# Altium PCB Copy of Main_Board.PcbDoc (part 1 of 4)
Units mil, origin at the board's own origin, x right, y up, seen from the top; angles counter-clockwise.
Board outline 5818.45 x 4760.12 mil, 4 copper layers (Top Layer, POWER, GROUND, Bottom Layer), stack 30.634 mil thick; 298 components, 323 nets, 1386 pads, 599 vias.
Unrouted connection lines stored in the file: 1.
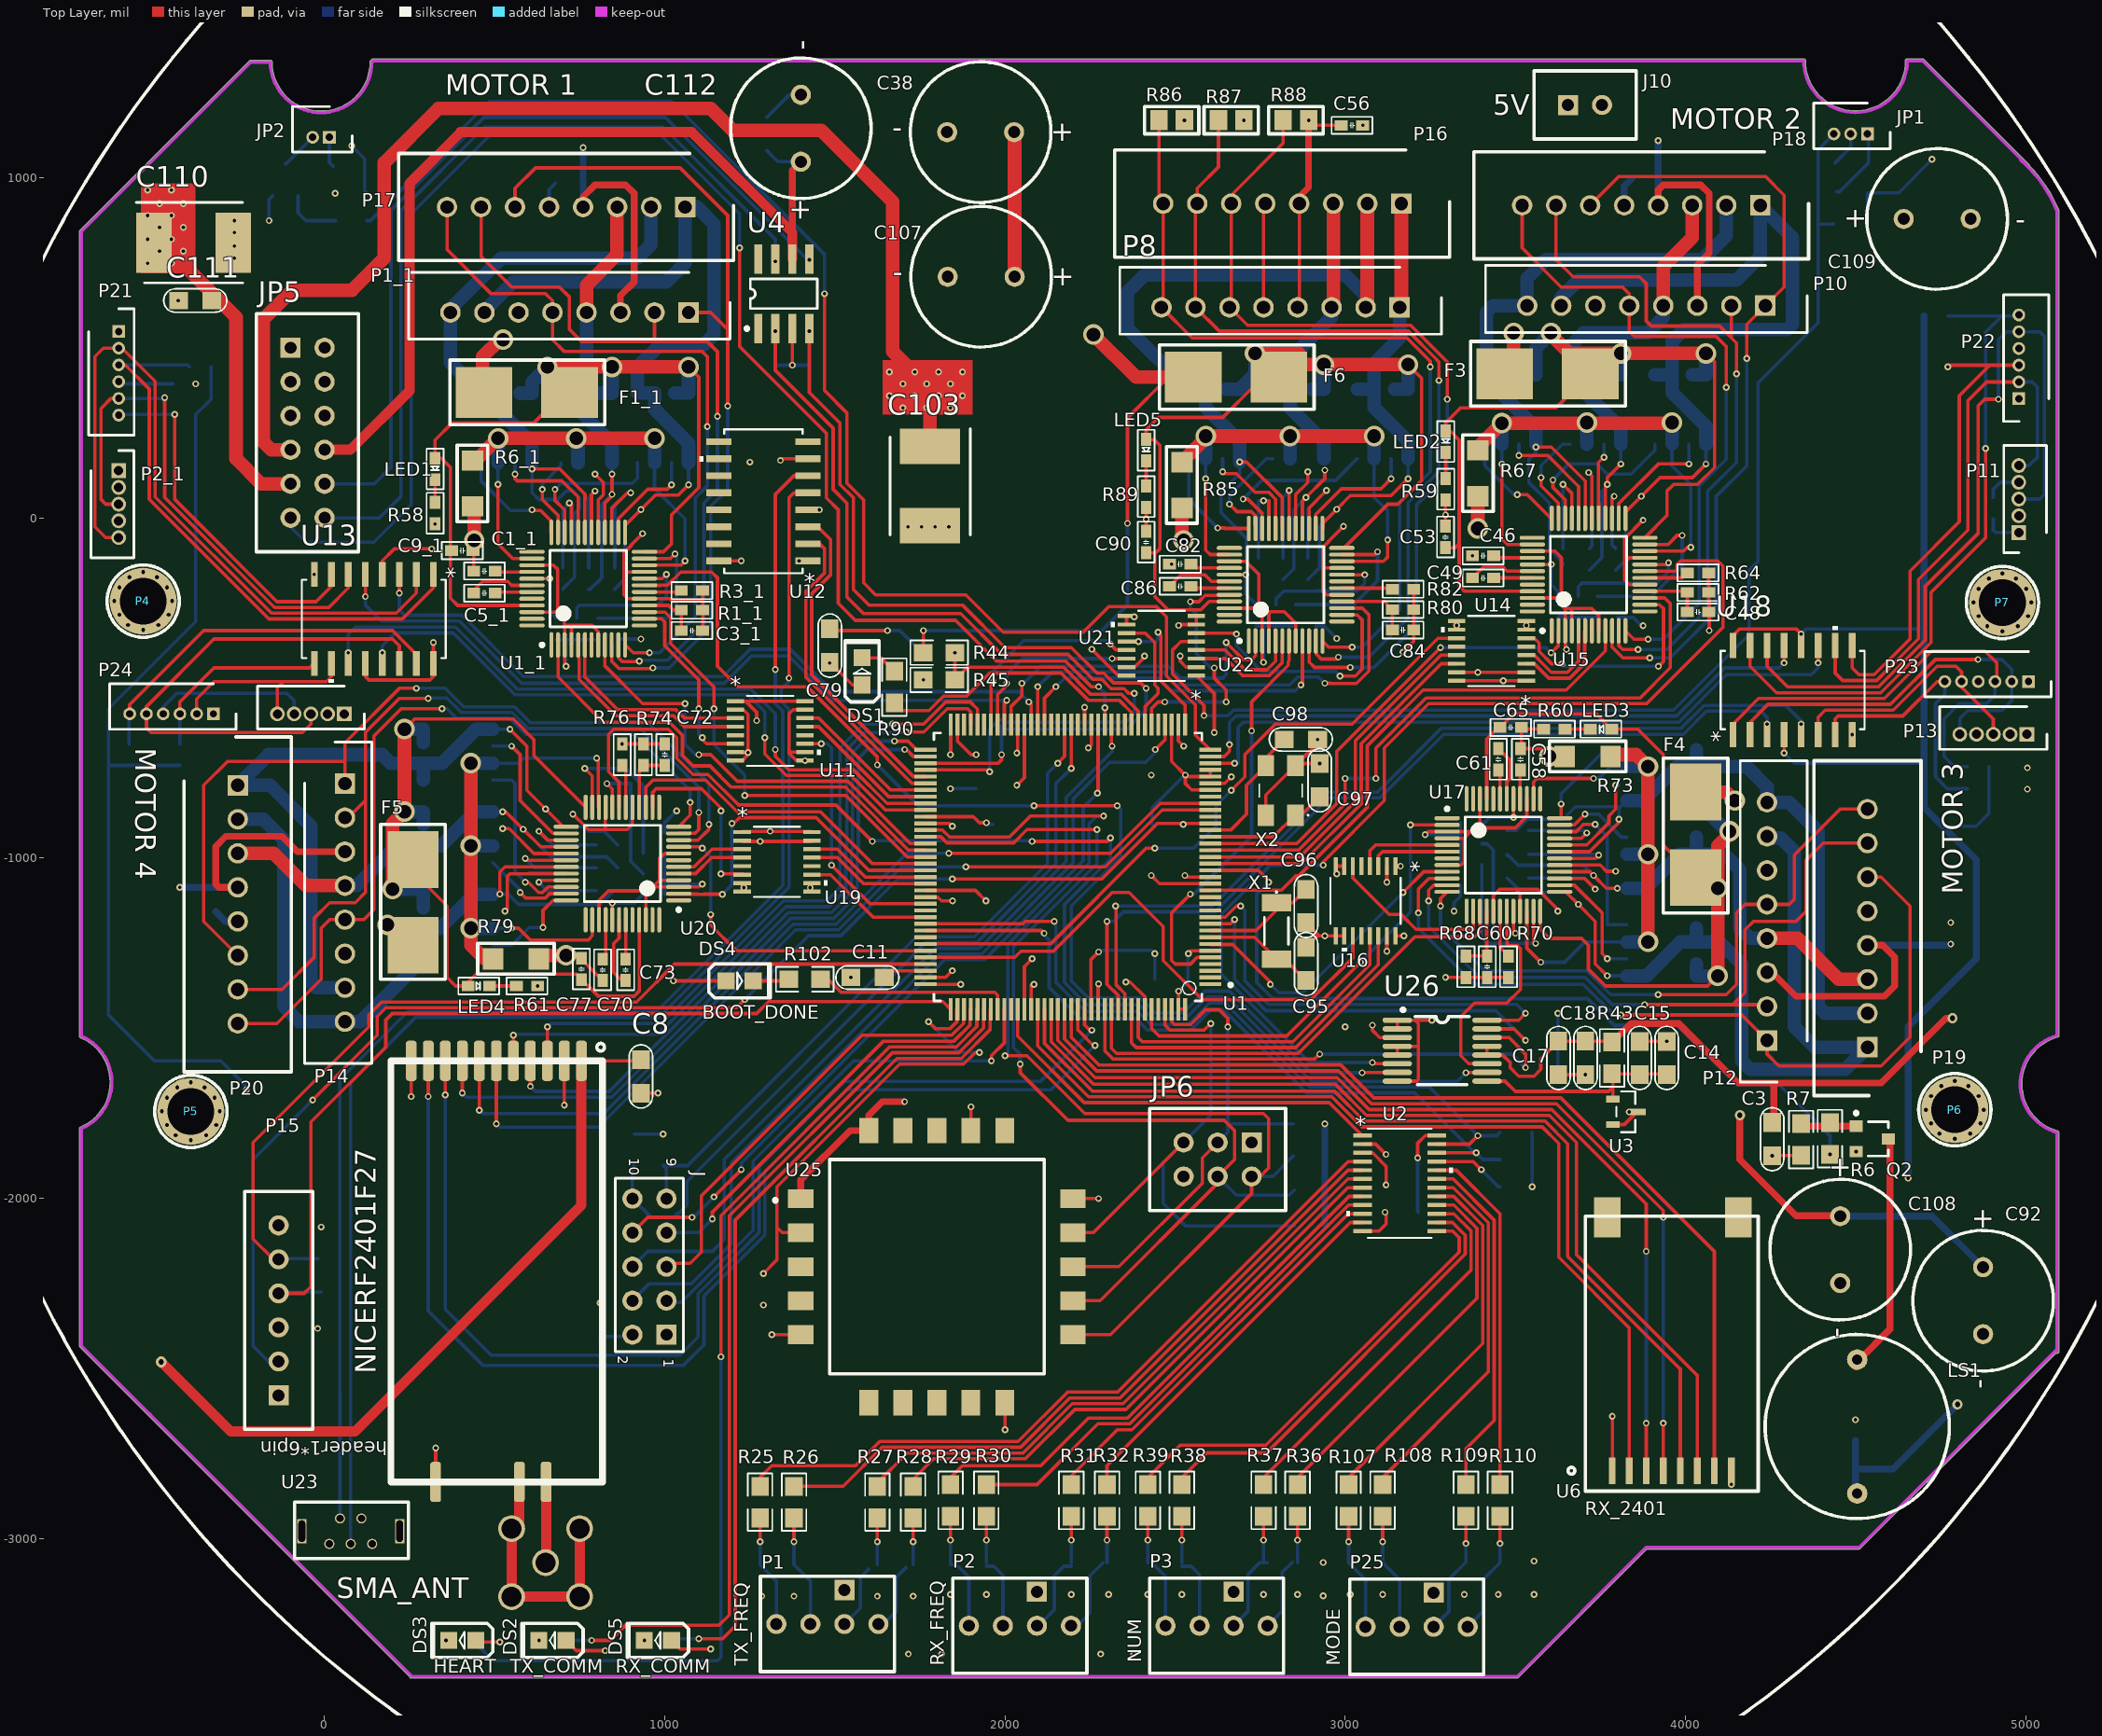
[diagram p0: Top Layer view]
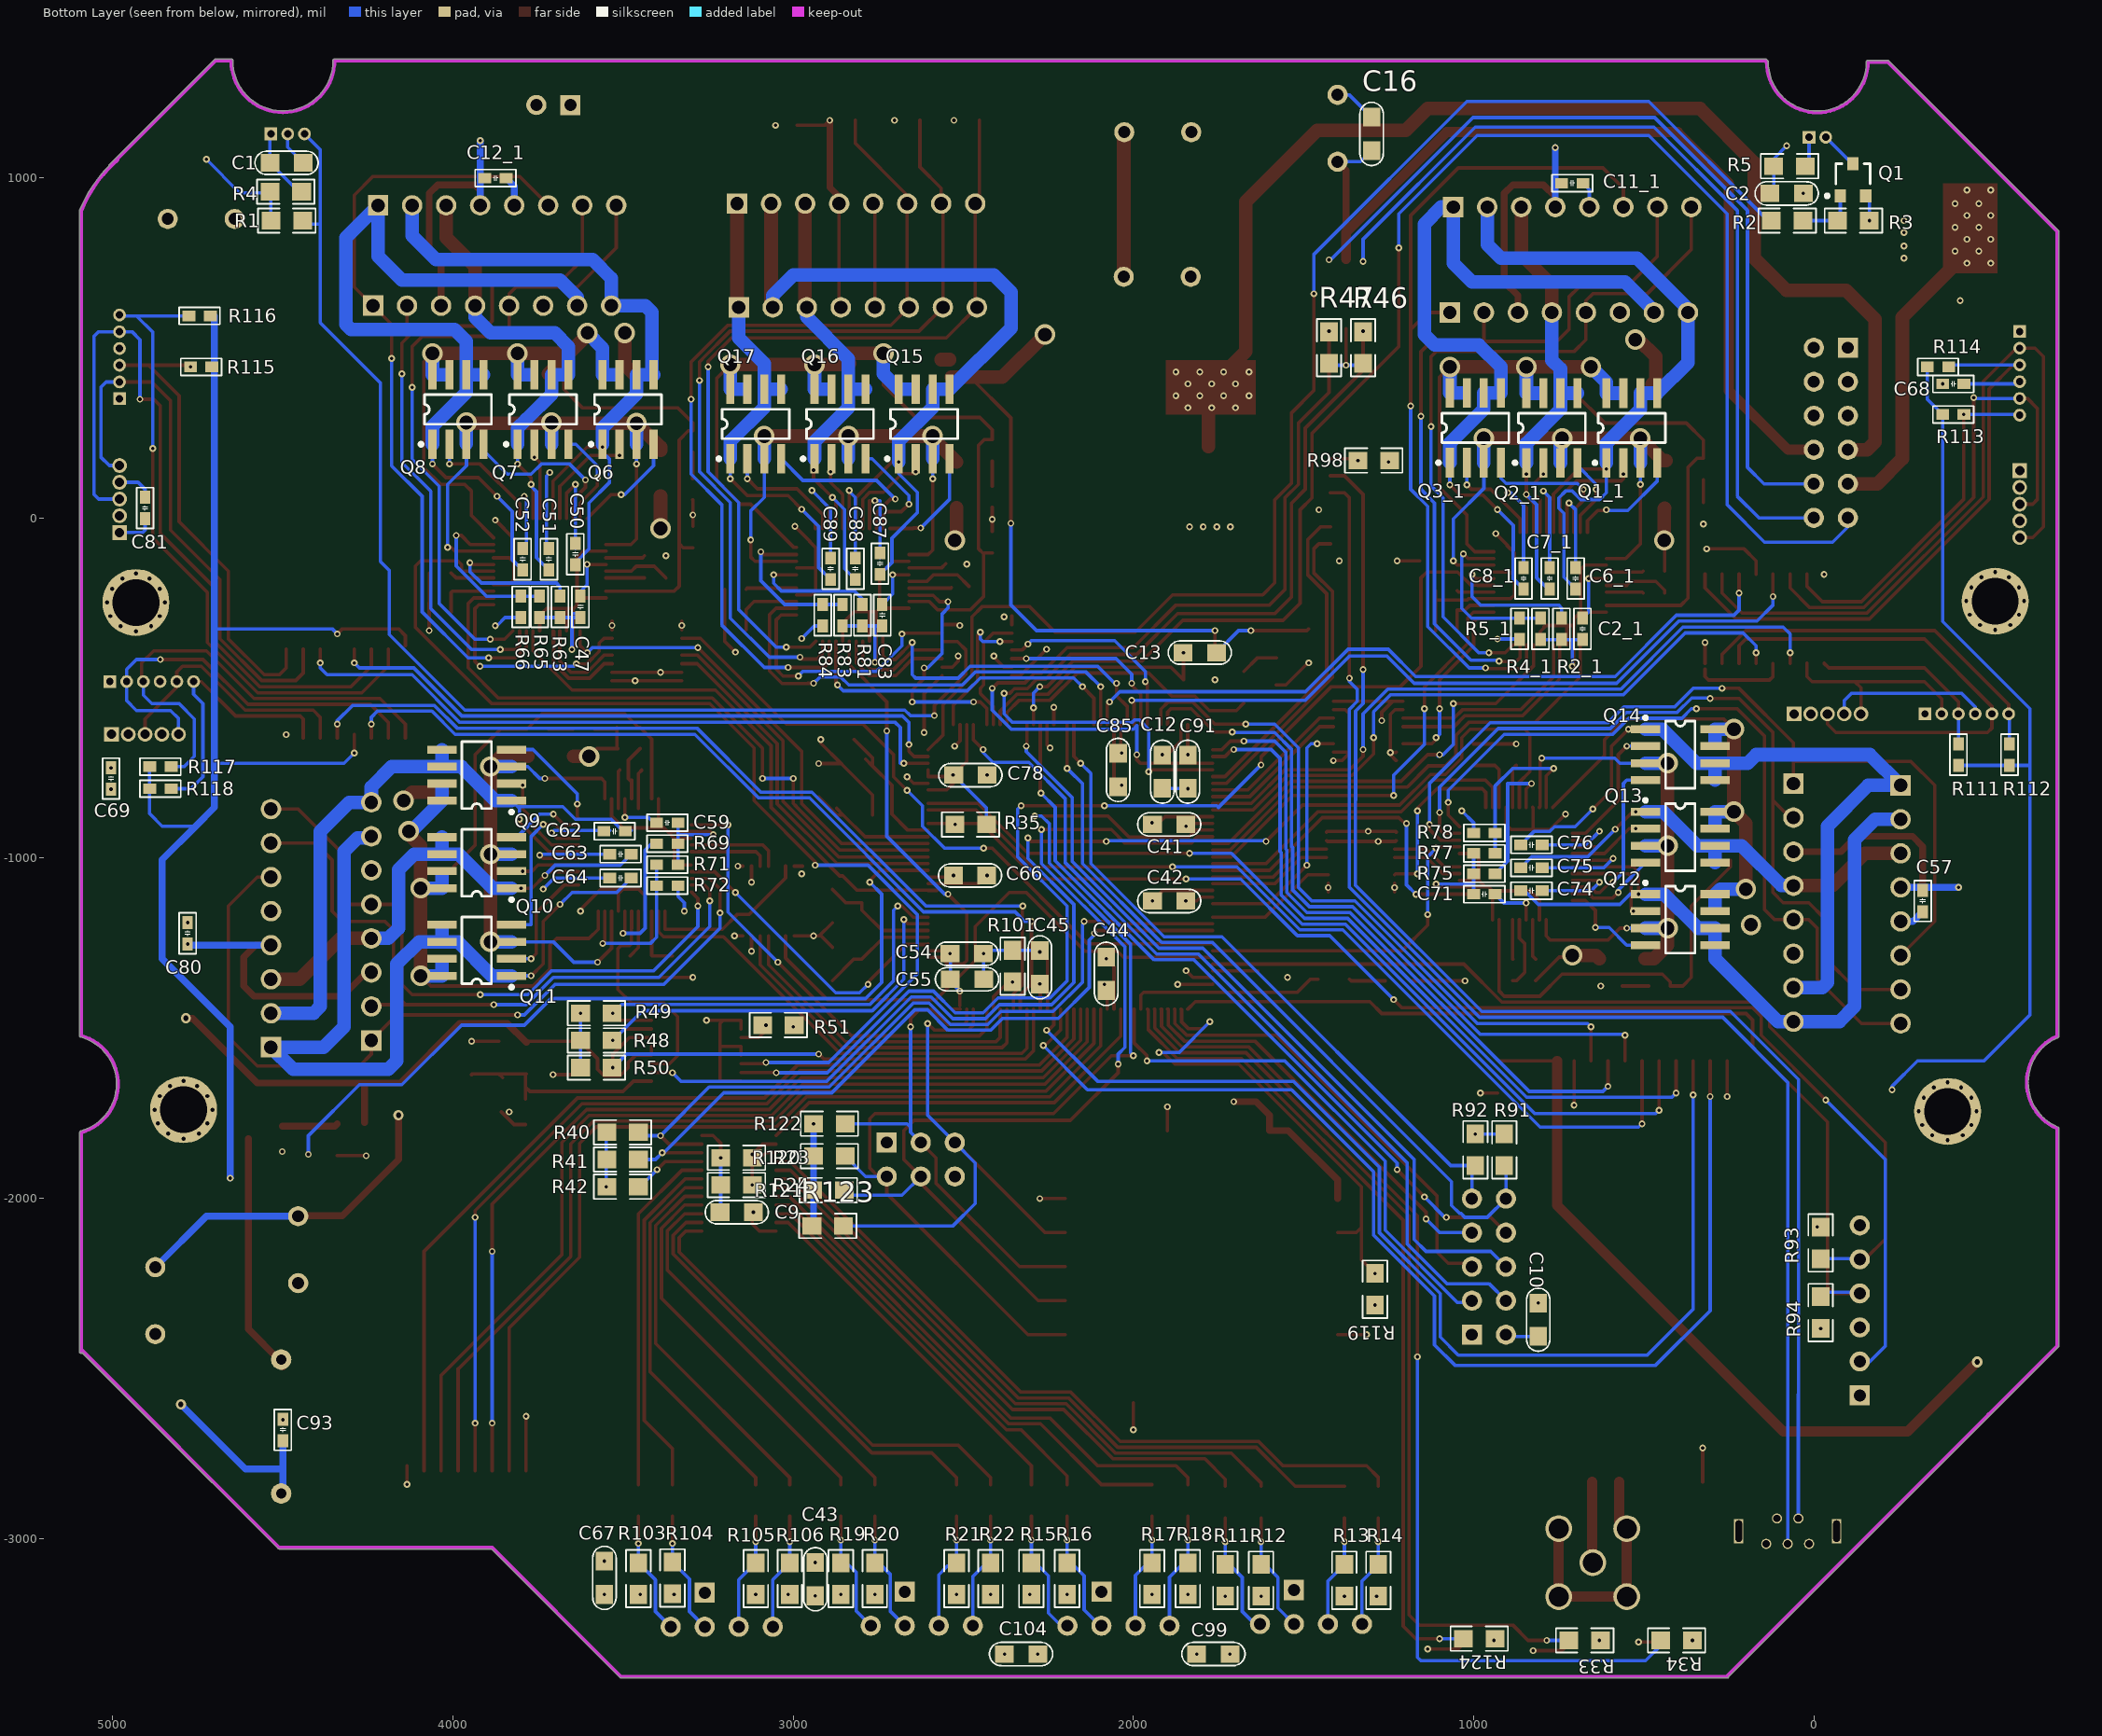
[diagram p1: Bottom Layer view, seen from below]
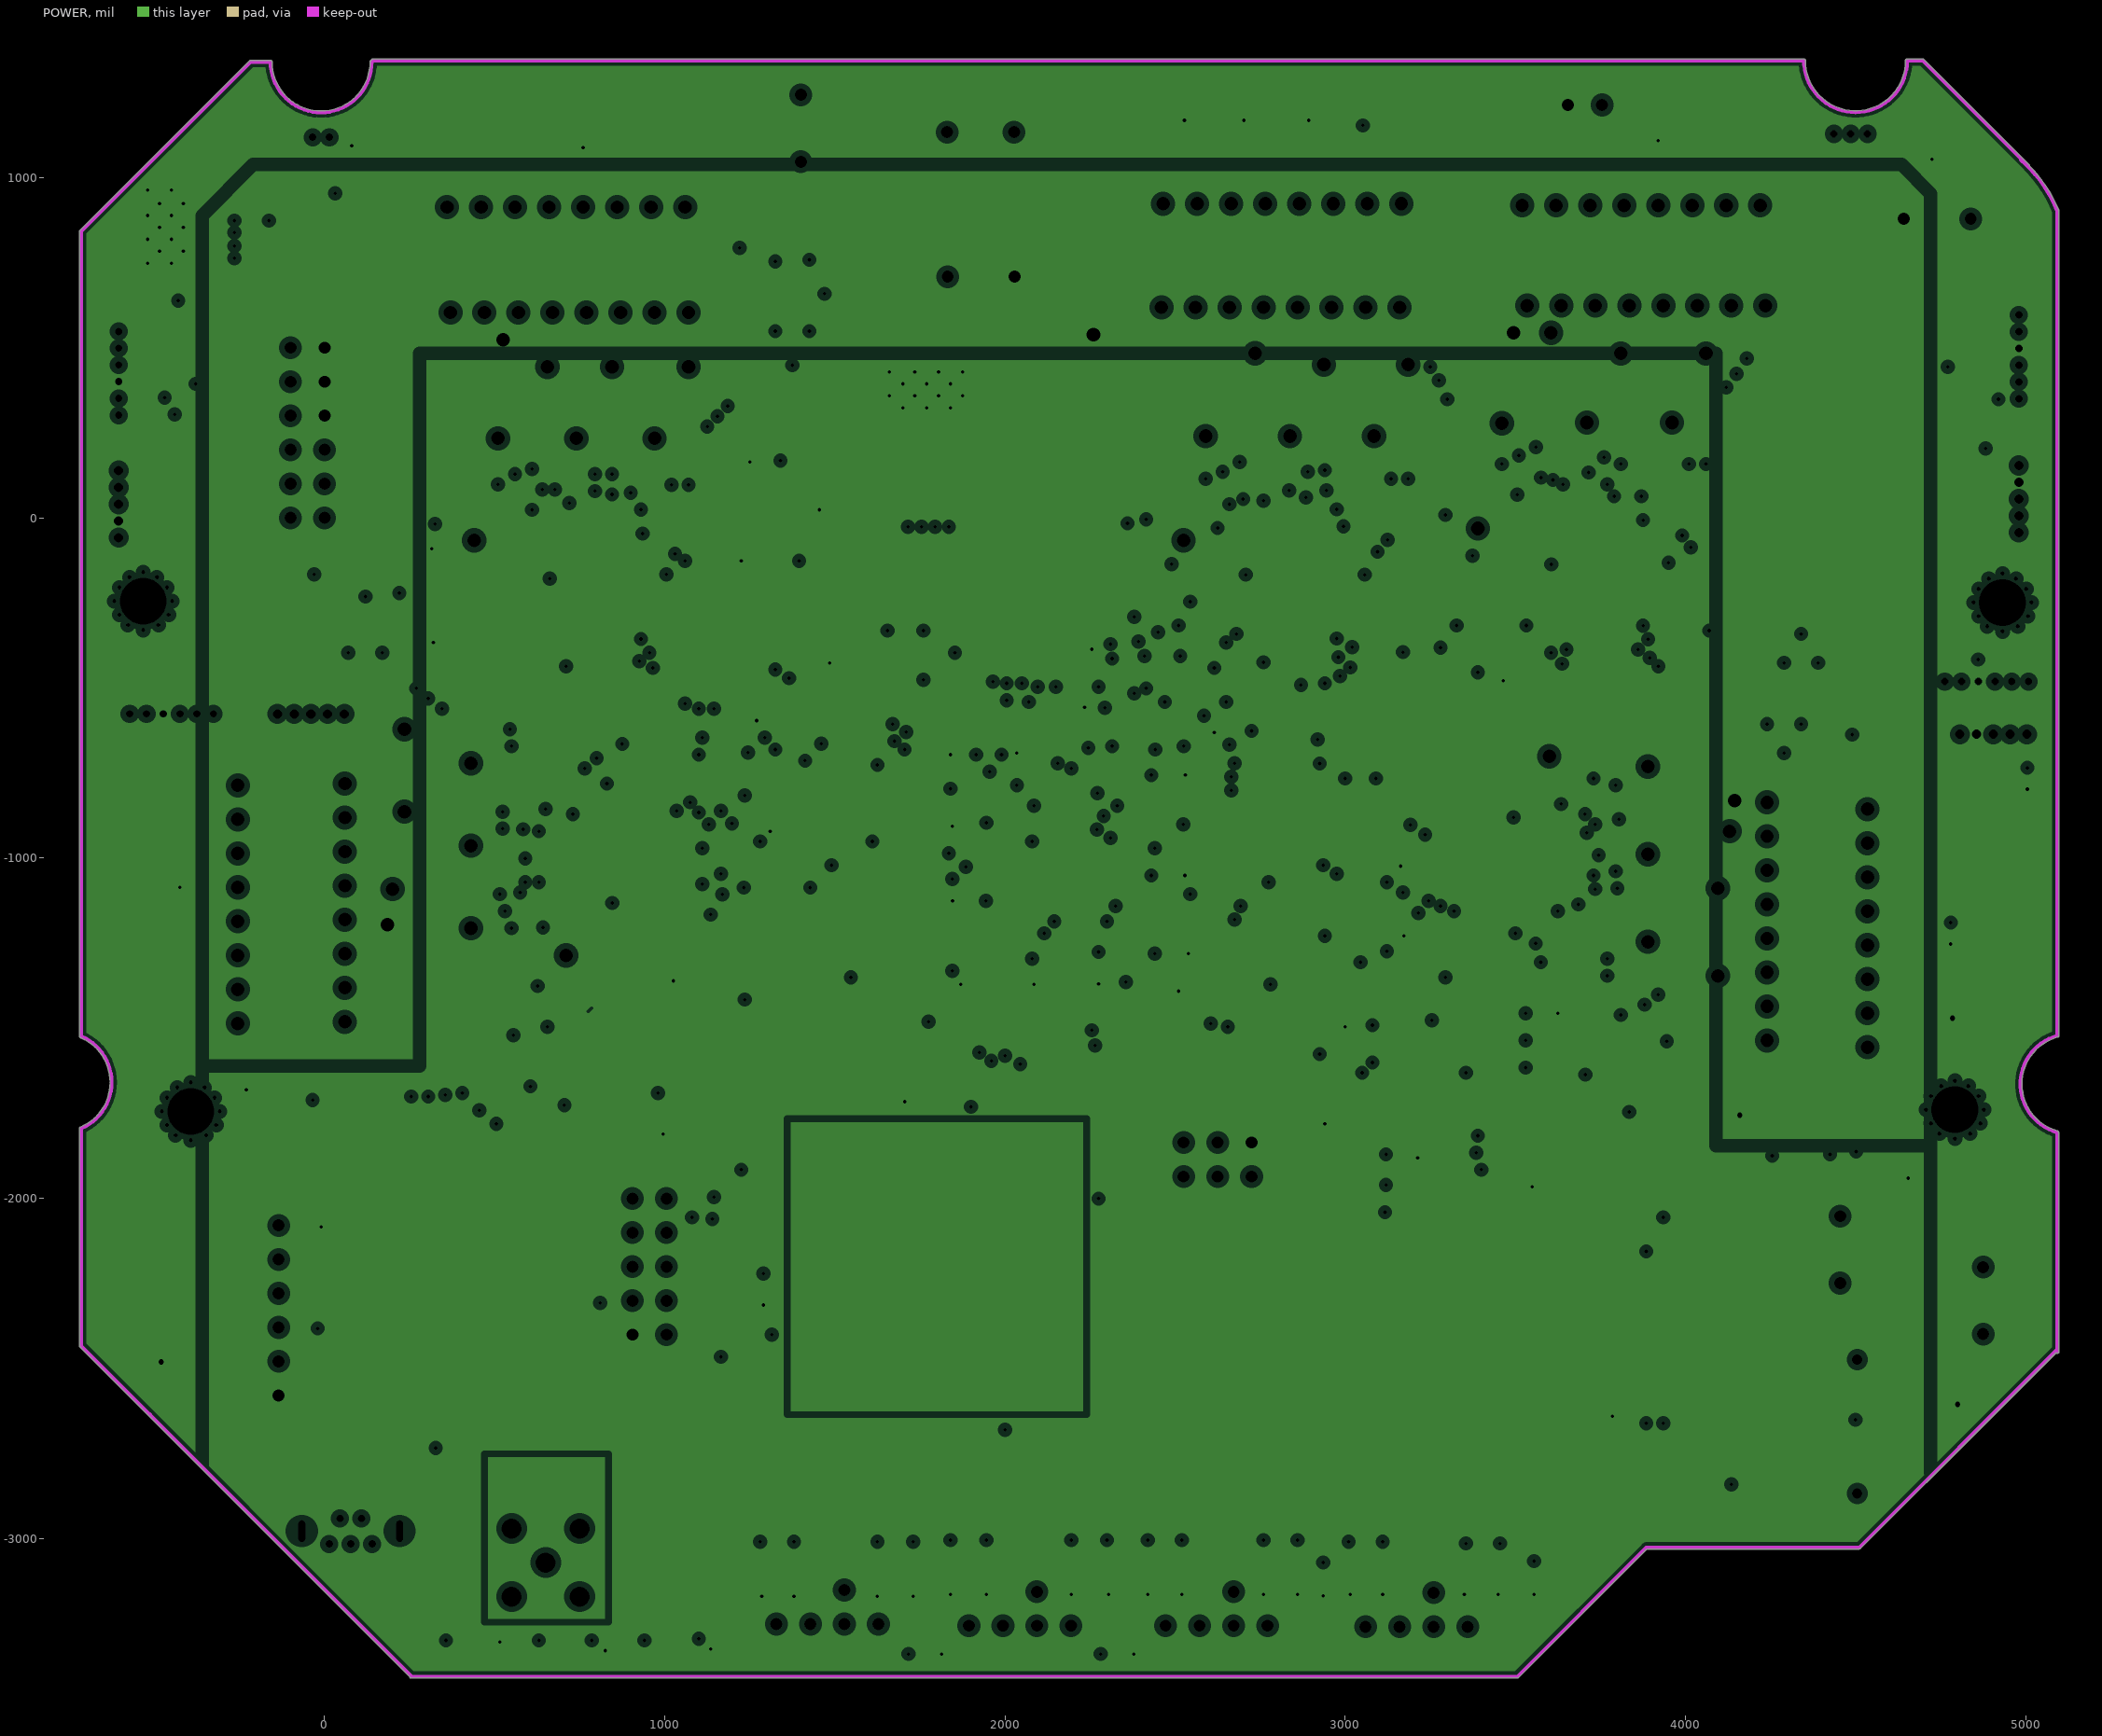
[diagram p2: POWER, clearances drawn from the general rule]
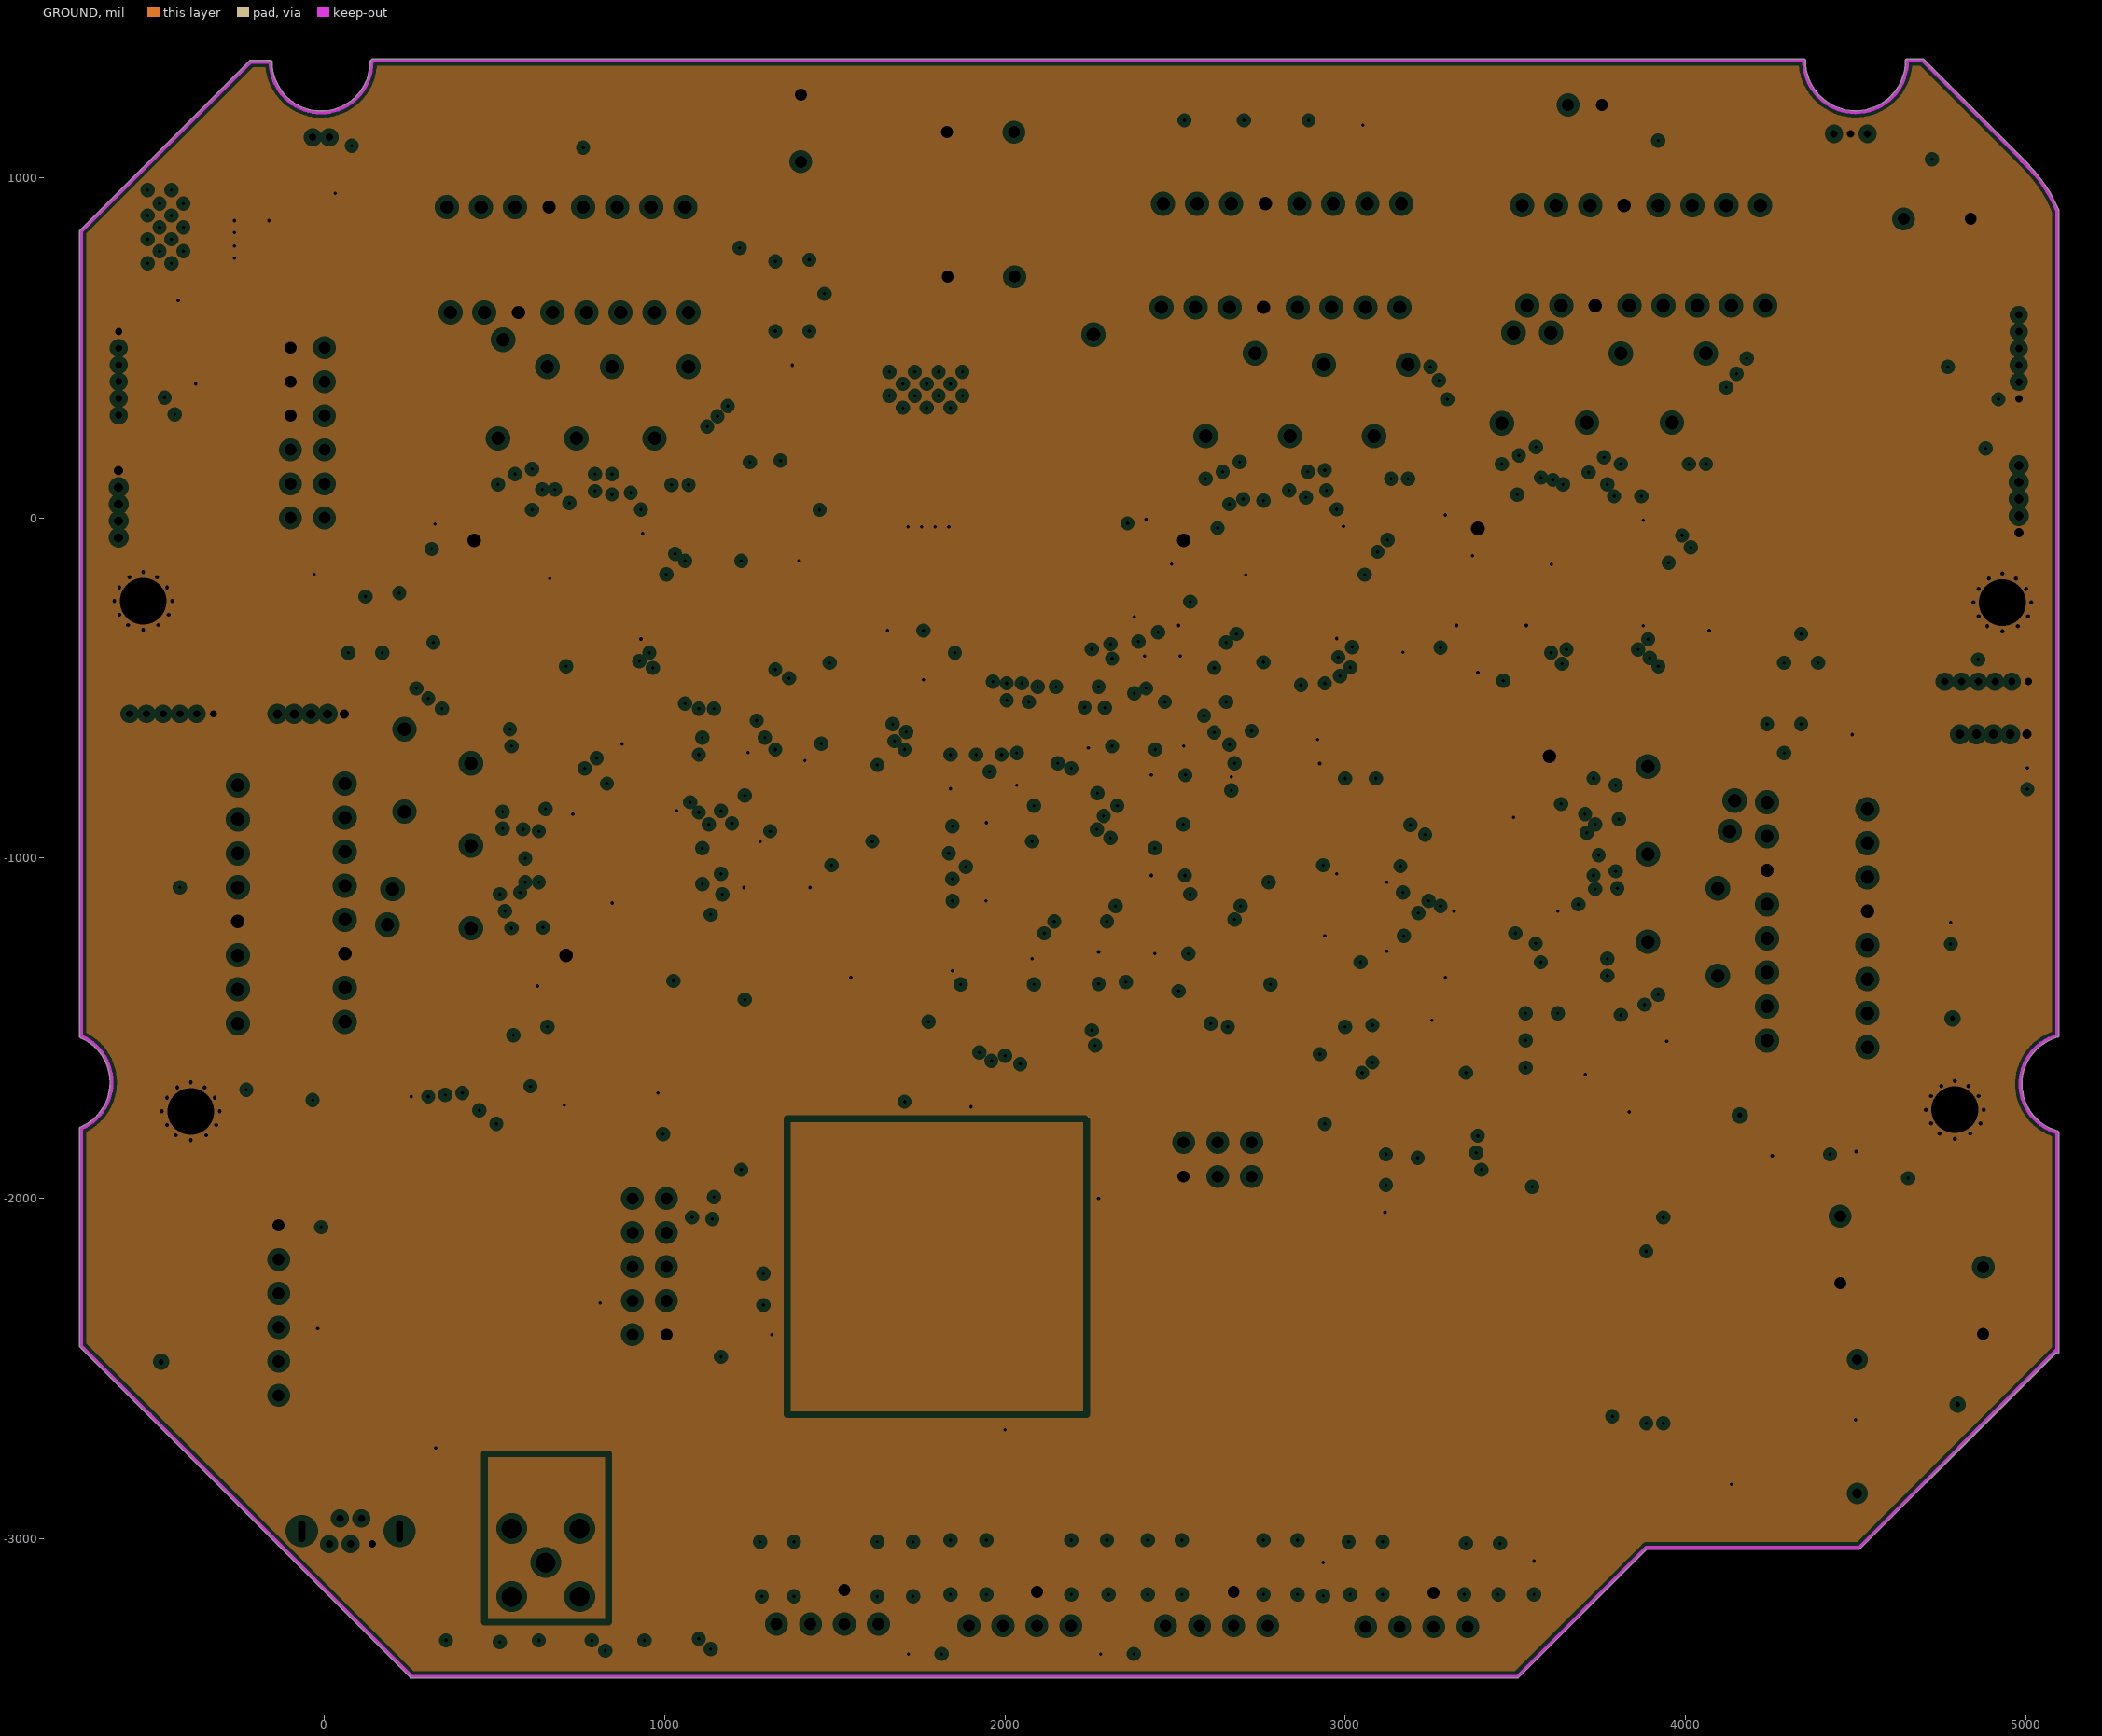
[diagram p3: GROUND, clearances drawn from the general rule]

## Layer stack, top to bottom
Top Solder: solder mask 0.4, Solder Resist, Dk 3.5
Top Layer: signal copper 1.4
Dielectric 1: core 10, FR-4, Dk 4.2
POWER: plane copper 1.417, net (Multiple Nets)
Dielectric 3: prepreg 5, Dk 4.2
GROUND: plane copper 1.417, net GND
Dielectric 2: core 10, Dk 4.2
Bottom Layer: signal copper 1.4
Bottom Solder: solder mask 0.4, Solder Resist, Dk 3.5

## Board outline
-720.02,-2433.98 -720.02,-1797.86 cw(c-715.45,-1795.8) -717.41,-1791.18 ccw(c-773.28,-1659.57) -630.29,-1659.57 ccw(c-773.28,-1659.57) -714.99,-1529 cw(c-715.01,-1523.98) -719.37,-1526.46 cw(c-715.45,-1523.33) -720.02,-1521.27 -720.02,841.5 cw(c-715.01,841.5) -718.54,845.06 -718.55,845.05 -220.16,1343.44 -220.18,1343.43 cw(c-216.61,1339.9) -220.14,1343.47 cw(c-216.57,1339.94) -216.57,1344.96 -159.07,1344.96 cw(c-159.07,1339.94) -154.06,1339.94 cw(c-159.07,1339.94) -154.06,1339.92 ccw(c-10.01,1340.07) 134.04,1340.07 ccw(c-10.01,1340.07) 134.04,1340.16 cw(c139.06,1340.2) 135.51,1343.75 139.11,1347.35 139.09,1347.33 cw(c142.65,1343.8) 142.65,1348.81 4347.92,1348.81 cw(c4347.92,1343.8) 4352.94,1343.8 cw(c4347.92,1343.8) 4352.94,1343.79 ccw(c4499.99,1343.62) 4647.05,1343.62 ccw(c4499.99,1343.62) 4647.05,1344.06 cw(c4652.06,1344.07) 4648.53,1347.63 cw(c4652.09,1344.1) 4652.09,1349.12 4696.9,1349.12 cw(c4696.9,1344.1) 4700.47,1347.63 4700.45,1347.65 5010.04,1038.06 cw(c5006.49,1034.52) 5011.51,1034.52 cw(c5006.49,1034.52) 5011.51,1034.42 cw(c4727.24,755.06) 5095.98,906.33 cw(c5092.97,902.31) 5097.99,902.31 5097.99,-1522.02 cw(c5092.97,-1522.02) 5093.13,-1527.03 ccw(c5132.24,-1664.57) 5093.47,-1802.2 cw(c5092.12,-1807.02) 5097.13,-1807.02 cw(c5092.12,-1807.02) 5097.13,-1807.02 5097.98,-2443.67 cw(c5092.97,-2443.98) 5097.99,-2443.98 cw(c5092.97,-2443.98) 5097.98,-2444.28 5097.99,-2451 cw(c5092.97,-2451) 5097.99,-2451 cw(c5092.97,-2451) 5089.46,-2454.59 4898.79,-2645.25 cw(c4894.99,-2641.98) 4898.52,-2645.55 4898.54,-2645.53 4514.14,-3029.93 4514.16,-3029.91 cw(c4510.59,-3026.38) 4510.59,-3031.4 3887.07,-3031.4 3508.94,-3409.53 3508.95,-3409.51 cw(c3505.39,-3405.98) 3505.39,-3411 2551.1,-3411 254.99,-3411 cw(c254.99,-3405.98) 249.98,-3406.06 -718.55,-2437.53 -718.54,-2437.55 cw(c-715.01,-2433.98)

## Design rules (kind name [scope] priority, off if disabled: settings)
Clearance [All] p1: gap=7 ignorepadtopadclearanceinfootprint=TRUE
ComponentClearance [All] p1: gap=0 collisioncheckmode=3 verticalgap=0 showdistances=FALSE
HoleSize [All] p1: absolutevalues=TRUE maxlimit=1000 minlimit=7 maxpercent=80.000 minpercent=20.000
HoleToHoleClearance [All] p1: gap=5.5 allowstackedmicrovias=TRUE
MinimumSolderMaskSliver [All] p1: minsoldermaskwidth=0
PlaneClearance [All] p1: clearance=16
PlaneConnect [All] p1: planeconnectstyle=Direct reliefexpansion=20 reliefentries=4 reliefconductorwidth=10 reliefairgap=10
PolygonConnect [All] p1: connectstyle=Direct reliefconductorwidth=10 reliefentries=4 polygonreliefangle="90 Angle" airgapwidth=10
RoomDefinition Motor_d [InComponentClass('Motor_d')] p1 off: confinementstyle=ConfineIn formatcopy=TRUE lockcomponents=FALSE outline -16600.01,-13221.38 -14600.01,-13221.38 -14600.01,-12221.38 -16600.01,-12221.38
RoomDefinition Motor_4 [InComponentClass('Motor_4')] p2 off: confinementstyle=ConfineIn formatcopy=TRUE lockcomponents=FALSE outline -16600.01,-13221.38 -14600.01,-13221.38 -14600.01,-12221.38 -16600.01,-12221.38
RoomDefinition Motor_3 [InComponentClass('Motor_3')] p3 off: confinementstyle=ConfineIn formatcopy=TRUE lockcomponents=FALSE outline -16600.01,-13221.38 -14600.01,-13221.38 -14600.01,-12221.38 -16600.01,-12221.38
RoomDefinition Motor_2 [InComponentClass('Motor_2')] p4 off: confinementstyle=ConfineIn formatcopy=TRUE lockcomponents=FALSE outline -16600.01,-13221.38 -14600.01,-13221.38 -14600.01,-12221.38 -16600.01,-12221.38
RoomDefinition Motor_1 [InComponentClass('Motor_1')] p5 off: confinementstyle=ConfineIn formatcopy=TRUE lockcomponents=FALSE outline -16600.01,-13221.38 -14600.01,-13221.38 -14600.01,-12221.38 -16600.01,-12221.38
RoomDefinition Main_Board [InComponentClass('Main_Board')] p6 off: confinementstyle=ConfineIn formatcopy=TRUE lockcomponents=FALSE outline -16600.01,-13221.38 -14600.01,-13221.38 -14600.01,-12221.38 -16600.01,-12221.38
RoutingVias [All] p1: holewidth=10 width=20 viastyle="Through Hole" minholewidth=7 minwidth=14 maxholewidth=150 maxwidth=200
SilkToSilkClearance [All] p1: silktosilkclearance=0
SilkToSolderMaskClearance [IsPad] p1: minsilkscreentomaskgap=0 clearancetoexposedcopper=TRUE
SolderMaskExpansion [All] p1: expansion=4
UnRoutedNet [All] p1: checkbadconnections=TRUE
Width [All] p1: maxlimit=100 minlimit=10 preferedwidth=40
21 further rules are at their usual default settings.

## Classes and differential pairs
component class Motor_d: C82 C83 C84 C86 C87 C88 C89 C90 C92 C93 F6 LED5 P8 P16 Q15 Q16 Q17 R80 R81 R82 R83 R84 R85 R86 R87 R88 R89 U21 U22
component class Motor_4: C70 C71 C72 C73 C74 C75 C76 C77 C80 C81 F5 LED4 P14 P15 P20 P24 Q12 Q13 Q14 R61 R74 R75 R76 R77 R78 R79 U19 U20
component class Motor_3: C58 C59 C60 C61 C62 C63 C64 C65 C68 C69 F4 LED3 P12 P13 P19 P23 Q9 Q10 Q11 R60 R68 R69 R70 R71 R72 R73 R115 R116 R117 R118 U16 U17 U18
component class Motor_2: C46 C47 C48 C49 C50 C51 C52 C53 C56 C57 C108 C109 F3 LED2 P10 P11 P18 P22 Q6 Q7 Q8 R59 R62 R63 R64 R65 R66 R67 U14 U15
component class Motor_1: C1_1 C2_1 C3_1 C5_1 C6_1 C7_1 C8_1 C9_1 C10_1 C11_1 C12_1 C38 C107 F1_1 LED1 P1_1 P2_1 P17 P21 Q1_1 Q2_1 Q3_1 R1_1 R2_1 R3_1 R4_1 R5_1 R6_1 R58 R111 R112 R113 R114 U1_1 U11 U13
component class Main_Board: C1 C2 C3 C8 C9 C10 C11 C12 C13 C14 C15 C16 C17 C18 C25 C41 C42 C43 C44 C45 C54 C55 C66 C67 C78 C79 C85 C91 C95 C96 C97 C98 C99 C103 C104 C110 C111 C112 DS1 DS2 DS3 DS4 DS5 header1*6pin J J10 JP1 JP2 JP5 JP6 LS1 NICERF2401F27 P1 P2 P3 P4 P5 P6 P7 P25 Q1 Q2 R1 R2 R3 R4 R5 R6 R7 R11 R12 R13 R14 R15 R16 R17 R18 R19 R20 R21 R22 R23 R24 R25 R26 R27 R28 R29 R30 R31 R32 R33 R34 R35 R36 R37 R38 R39 R40 R41 R42 R43 R44 R45 R46 R47 R48 R49 R50 R51 R90 R91 R92 R93 R94 R98 R101 R102 R103 R104 R105 R106 R107 R108 R109 R110 R119 R120 R121 R122 R123 R124 SMA_ANT U1 U2 U3 U4 U6 U12 U23 U25 U26 X1 X2

## Components (designator, comment, footprint, x,y, rotation, side; value= is the part's Value field where it differs from the comment)
C1 "0.1uf" 0805C 4533.99,1043.62 r180 bottom value=0.1uF
C1_1 "1uF" 0603C 469.99,-156.38 r0 top
C2 "0.1uf" 0805C 34.99,953.62 r0 bottom value=0.1uF
C2_1 "1uF" 0603C 679.99,-326.38 r270 bottom
C3 "0.1uF" 0805C 4254.99,-1871.38 r90 top
C3_1 "1nF" 0603C 1079.99,-331.38 r180 top
C5_1 "470nF" 0603C 469.99,-221.38 r180 top
C6_1 "33nF" 0603C 699.99,-178.27 r90 bottom
C7_1 "33nF" 0603C 776.57,-178.27 r90 bottom
C8 "0.1uF" 0805C 929.99,-1597.38 r270 top
C8_1 "33nF" 0603C 853.15,-178.27 r90 bottom
C9 "0.1uF" 0805C 3120.99,-2041.38 r0 bottom
C9_1 "1uF" 0603C 404.99,-96.38 r180 top
C10 "0.1uF" 0805C 809.99,-2312.38 r270 bottom
C11 "1uf" 0805C 1550.99,-1351.38 r0 top value=1uF
C11_1 "0.1uF" 0603C 709.99,983.62 r0 bottom
C12 "1uf" 0805C 1914.99,-791.38 r90 bottom value=1uF
C12_1 "0.1uF" 0603C 3874.99,998.62 r0 bottom
C13 "10uF" 0805C 1759.99,-396.38 r0 bottom
C14 "1uF" 0805C 3944.99,-1543.07 r270 top
C15 "0.1uF" 0805C 3865.49,-1543.07 r270 top
C16 "0.1uF" 0805C 1299.99,1083.62 r90 bottom
C17 "0.1uF" 0805C 3626.79,-1632.7 r90 top
C18 "0.1uF" 0805C 3706.29,-1632.7 r90 top
C38 "470uF" 470uF 1928.42,1133.62 r180 top
C41 "0.1uF" 0805C 1849.99,-901.38 r0 bottom
C42 "0.1uF" 0805C 1849.99,-1126.38 r0 bottom
C43 "0.1uF" 0805C 2934.99,-3165.08 r90 bottom
C44 "0.1uF" 0805C 2079.99,-1385.38 r90 bottom
C45 "0.1uF" 0805C 2274.99,-1366.38 r90 bottom
C46 "1uF" 0603C 3405.46,-111.85 r0 top
C47 "1uF" 0603C 3625.46,-261.85 r270 bottom
C48 "1nF" 0603C 4036.96,-276.85 r180 top
C49 "470nF" 0603C 3405.46,-176.85 r180 top
C50 "33nF" 0603C 3640.46,-106.85 r90 bottom
C51 "33nF" 0603C 3717.96,-121.85 r90 bottom
C52 "33nf" 0603C 3795.46,-121.85 r90 bottom value=33nF
C53 "1uF" 0603C 3294.99,-56.38 r270 top
C54 "0.1uF" 0805C 2534.99,-1281.38 r180 bottom
C55 "0.1uF" 0805C 2533.99,-1356.38 r180 bottom
C56 "0.1uF" 0603C 3019.99,1153.62 r180 top
C57 "0.1uF" 0603C -320.01,-1126.38 r90 bottom
C58 "1uF" 0603C 3514.99,-709.88 r270 top
C59 "1uF" 0603C 3369.99,-896.38 r180 bottom
C60 "1nF" 0603C 3417.49,-1319.88 r90 top
C61 "470nF" 0603C 3449.99,-709.88 r90 top
C62 "33nF" 0603C 3524.99,-921.38 r0 bottom
C63 "33nF" 0603C 3507.49,-988.88 r0 bottom
C64 "33nF" 0603C 3507.49,-1058.88 r0 bottom
C65 "1uF" 0603C 3486.49,-616.38 r180 top
C66 "0.1uF" 0805C 2524.99,-1051.38 r180 bottom
C67 "0.1uF" 0805C 3554.99,-3161.08 r90 bottom
C68 "0.1uF" 0603C -410.01,393.62 r180 bottom
C69 "0.1uF" 0603C 5004.99,-766.38 r270 bottom
C70 "1uF" 0603C 817.49,-1328.88 r90 top
C71 "1uF" 0603C 968.49,-1106.38 r0 bottom
C72 "1nF" 0603C 999.99,-696.38 r270 top
C73 "470nF" 0603C 884.99,-1328.88 r270 top
C74 "33nF" 0603C 829.99,-1096.38 r180 bottom
C75 "33nF" 0603C 829.99,-1028.88 r180 bottom
C76 "33nF" 0603C 829.99,-961.38 r180 bottom
C77 "1uF" 0603C 754.99,-1326.38 r270 top
C78 "0.1uF" 0805C 2523.99,-756.38 r180 bottom
C79 "0.1uF" 0805C 1484.99,-420.38 r90 top
C80 "0.1uF" 0603C 4779.99,-1221.38 r270 bottom
C81 "0.1uF" 0603C 4904.99,28.62 r90 bottom
C82 "1uF" 0603C 2514.99,-136.38 r0 top
C83 "1uF" 0603C 2738.33,-286.38 r270 bottom
C84 "1nF" 0603C 3169.99,-329.88 r180 top
C85 "0.1uF" 0805C 2044.99,-696.38 r270 bottom
C86 "470nF" 0603C 2514.99,-201.38 r180 top
C87 "33nF" 0603C 2744.99,-134.88 r90 bottom
C88 "33nF" 0603C 2817.49,-149.88 r90 bottom
C89 "33nF" 0603C 2889.99,-149.88 r90 bottom
C90 "1uF" 0603C 2414.99,-71.38 r270 top
C91 "0.1uF" 0805C 1839.99,-701.38 r270 bottom
C92 "470uF" 470uF 4874.99,-2301.38 r270 top
C93 "0.1uF" 0603C 4499.99,-2681.38 r270 bottom
C95 "2pf" 0805C 2884.99,-1356.38 r90 top value=2pF
C96 "2pf" 0805C 2884.99,-1096.38 r270 top value=2pF
C97 "4.3pf" 0805C 2924.99,-816.38 r90 top value=4.3pF
C98 "4.3pf" 0805C 2824.99,-651.38 r0 top value=4.3pF
C99 "0.1uF" 0805C 1719.99,-3340.08 r0 bottom
C103 "CAP470" CAPPM7360X200N 1779.99,93.62 r270 top
C104 "0.1uF" 0805C 2374.99,-3340.08 r180 bottom
C107 "470uF" 470uF 1929.99,708.62 r180 top
C108 "470uF" 470uF 4454.99,-2151.38 r270 top
C109 "470uF" 470uF 4739.99,878.62 r0 top
C110 "CAP470" CAPPM7360X200N -385.01,808.62 r0 top
C111 "0.1uF" 0805C -335.01,638.62 r180 top
C112 "470uF" 470uF 1399.99,1145.19 r90 top
DS1 "LED2" 0805D 1579.99,-491.38 r90 top
DS2 "LED1" 0805D 709.99,-3300.08 r180 top
DS3 "LED2" 0805D 444.99,-3300.08 r180 top
DS4 "LED2" 0805D 1179.99,-1361.38 r0 top
DS5 "LED1" 0805D 1019.99,-3300.08 r180 top
F1_1 "10A" FUSE_HEADER 468.81,368.62 r0 top
F3 "10A" FUSE_HEADER 3468.81,423.62 r0 top
F4 "10A" FUSE_HEADER 4029.99,-806.38 r270 top
F5 "10A" FUSE_HEADER 259.99,-1256.38 r90 top
F6 "10A" FUSE_HEADER 2553.81,413.62 r0 top
header1*6pin "header1*6pin" 1*6_2.5mm -135,-2580 r90 top locked
J "10" 10 904.99,-2401.38 r90 top
J10 "1*2*2.5mm" 1*2_2.5mm 3654.99,1213.62 r270 top locked
JP1 "Header 3" SHDR3 4534.99,1128.62 r0 top
JP2 "Header 2" SHDR2 14.2,1118.62 r0 top
JP5 "Header 4X2" 2*6_2.5mm -100,500 r270 top locked
JP6 "header6pin" 2*3_2.5mm 2724.99,-1836.38 r180 top
LED1 "led" 0603_diode 324.99,143.62 r270 top
LED2 "led" 0603_diode 3295.46,224.09 r270 top
LED3 "led" 0603_diode 3751.49,-621.38 r180 top
LED4 "led" 0603_diode 453.49,-1376.38 r0 top
LED5 "led" 0603_diode 2414.99,198.62 r270 top
LS1 "Buzzer" Buzzer 4504.99,-2671.38 r90 top
NICERF2401F27 "NICERF2401F27" NICERF2401F27 754.99,-1596.38 r270 top locked
P1 "COAX-M" A6RV-161RS 1527.99,-3151.98 r0 top
P1_1 "Header_8P" "8P - WF25122" 719.99,603.62 r90 top locked
P2 "COAX-M" A6RV-161RS 2093.99,-3156.98 r0 top
P2_1 "Header 5" SHDR5 -605.01,138.62 r270 top locked
P3 "COAX-M" A6RV-161RS 2671.99,-3156.98 r0 top
P4 "安装孔" 安装孔-3.5-5 -533,-245 r0 top locked
P5 "安装孔" 安装孔-3.5-5 -393,-1745 r0 top locked
P6 "安装孔" 安装孔-3.5-5 4792,-1740 r0 top locked
P7 "安装孔" 安装孔-3.5-5 4932,-249 r0 top locked
P8 "Header_8P" "8P - WF25122" 2809.99,618.62 r90 top locked
P10 "Header_8P" "8P - WF25122" 3884.99,623.62 r90 top locked
P11 "Header 5" SHDR5 4979.99,-43.23 r90 top
P12 "Header_8P" "8P - WF25122" 4239.99,-1186.38 r0 top locked
P13 "Header 5" SHDR5 5003.42,-636.38 r180 top
P14 "Header_8P" "8P - WF25122" 59.99,-1131.38 r180 top locked
P15 "Header 5" SHDR5 58.42,-576.38 r180 top
P16 "Header_8P" SHDR8 2814.99,923.62 r90 top locked
P17 "Header_8P" SHDR8 709.99,913.62 r90 top locked
P18 "Header_8P" SHDR8 3869.99,918.62 r90 top locked
P19 "Header_8P" SHDR8 4534.99,-1206.38 r0 top locked
P20 "Header_8P" SHDR8 -255.01,-1136.38 r180 top locked
P21 "Header 5" SHDR6 -605.01,547.83 r270 top locked
P22 "Header 5" SHDR6 4979.99,350.19 r90 top
P23 "Header 5" SHDR6 5008.42,-481.38 r180 top
P24 "Header 5" SHDR6 -326.58,-576.38 r180 top
P25 "COAX-M" A6RV-161RS 3259.99,-3160.08 r0 top
Q1 "9013" SO-G3/Y1 -130.01,973.62 r180 bottom
Q1_1 "IRF8313" "so-8 bg" 609.99,161.73 r90 bottom
Q2 "9013" SO-G3/Y1 4529.06,-1840.82 r270 top
Q2_1 "IRF8313" "so-8 bg" 844.99,161.73 r90 bottom
Q3_1 "IRF8313" "so-8 bg" 1069.99,162 r90 bottom
Q6 "IRF8313" "so-8 bg" 3560.46,216.26 r90 bottom
Q7 "IRF8313" "so-8 bg" 3810.46,216.26 r90 bottom
Q8 "IRF8313" "so-8 bg" 4060.46,216.26 r90 bottom
Q9 "IRF8313" "so-8 bg" 3827.87,-831.38 r0 bottom
Q10 "IRF8313" "so-8 bg" 3827.87,-1088.88 r0 bottom
Q11 "IRF8313" "so-8 bg" 3827.87,-1346.38 r0 bottom
Q12 "IRF8313" "so-8 bg" 494.99,-1106.38 r180 bottom
Q13 "IRF8313" "so-8 bg" 494.99,-863.88 r180 bottom
Q14 "IRF8313" "so-8 bg" 494.99,-621.38 r180 bottom
Q15 "IRF8313" "so-8 bg" 2689.99,173.5 r90 bottom
Q16 "IRF8313" "so-8 bg" 2937.49,173.5 r90 bottom
Q17 "IRF8313" "so-8 bg" 3184.99,173.5 r90 bottom
R1 "20K" 0805R 4534.99,873.62 r180 bottom
R1_1 "47K" 0603R 1079.99,-271.38 r180 top
R2 "2.2K" 0805R 124.99,873.62 r180 bottom
R2_1 "100K" 0603R 741.66,-326.38 r270 bottom
R3 "1K" 0805R -70.01,873.62 r180 bottom
R3_1 "10K" 0603R 1079.99,-213.88 r180 top
R4 "100" 0805R 4444.99,958.62 r0 bottom
R4_1 "100k" 0603R 803.33,-326.38 r270 bottom
R5 "300" 0805R 24.99,1033.62 r0 bottom
R5_1 "10K" 0603R 864.99,-326.38 r90 bottom
R6 "2.2K" 0805R 4424.99,-1871.38 r90 top
R6_1 "0.02" "1206 10A" 434.99,33.62 r90 top value=0R02
R7 "1K" 0805R 4339.99,-1781.38 r270 top
R11 "10k" 0805R 1729.99,-3077.08 r270 bottom
R12 "10k" 0805R 1624.99,-3077.08 r270 bottom
R13 "10k" 0805R 1379.99,-3077.08 r270 bottom
R14 "10k" 0805R 1279.99,-3077.08 r270 bottom
R15 "10k" 0805R 2299.99,-3072.08 r270 bottom
R16 "10k" 0805R 2194.99,-3072.08 r270 bottom
R17 "10k" 0805R 1944.99,-3072.08 r270 bottom
R18 "10k" 0805R 1839.99,-3072.08 r270 bottom
R19 "10k" 0805R 2859.99,-3072.08 r270 bottom
R20 "10k" 0805R 2759.99,-3072.08 r270 bottom
R21 "10k" 0805R 2519.99,-3072.08 r270 bottom
R22 "10k" 0805R 2419.99,-3072.08 r270 bottom
R23 "10K" 0805R 3212.99,-1881.38 r180 bottom
R24 "10K" 0805R 3212.99,-1961.38 r180 bottom
R25 "10K" 0805R 1279.99,-2940.08 r90 top
R26 "10K" 0805R 1379.99,-2940.08 r90 top
R27 "10K" 0805R 1624.99,-2940.08 r90 top
R28 "10K" 0805R 1729.99,-2940.08 r90 top
R29 "10K" 0805R 1839.99,-2935.08 r90 top
R30 "10K" 0805R 1944.99,-2935.08 r90 top
R31 "10K" 0805R 2194.99,-2935.08 r90 top
R32 "10K" 0805R 2299.99,-2935.08 r90 top
R33 "3.3k" 0805R 719.99,-3300.08 r180 bottom
R34 "3.3k" 0805R 449.99,-3300.08 r180 bottom
R35 "10K" 0805R 2524.99,-901.38 r180 bottom
R36 "10K" 0805R 2859.99,-2842.08 r270 top
R37 "10K" 0805R 2759.99,-2842.08 r270 top
R38 "10K" 0805R 2519.99,-2842.08 r270 top
R39 "10K" 0805R 2419.99,-2842.08 r270 top
R40 "10K" 0805R 3454.99,-1806.38 r0 bottom value=10k
R41 "10K" 0805R 3454.99,-1886.38 r0 bottom value=10k
R42 "10K" 0805R 3454.99,-1966.38 r0 bottom
R43 "470" 0805R 3784.3,-1634.38 r90 top
R44 "22k" 0805R 1852.99,-396.38 r180 top
R45 "3.3k" 0805R 1759.99,-476.38 r0 top
R46 "10k" 0805R 1324.99,453.62 r90 bottom
R47 "10k" 0805R 1424.99,453.62 r90 bottom
R48 "10K" 0805R 3531.99,-1536.38 r0 bottom value=10k
R49 "10K" 0805R 3531.99,-1456.38 r0 bottom value=10k
R50 "10K" 0805R 3531.99,-1616.38 r0 bottom
R51 "10K" 0805R 3089.99,-1491.38 r180 bottom
R58 "10k" 0603 324.99,13.62 r90 top
R59 "10k" 0603 3295.46,84.09 r90 top
R60 "10k" 0603 3614.99,-621.38 r0 top
R61 "10k" 0603 594.99,-1376.38 r180 top
R62 "47K" 0603R 4036.96,-219.35 r180 top
R63 "100K" 0603R 3685.46,-261.85 r270 bottom
R64 "10K" 0603R 4036.96,-161.85 r180 top
R65 "100k" 0603R 3745.46,-261.85 r270 bottom value=150K
R66 "10K" 0603R 3800.46,-261.85 r90 bottom
R67 "0.02" "1206 10A" 3389.99,63.62 r90 top value=0R02
R68 "47K" 0603R 3354.99,-1319.88 r90 top
R69 "100K" 0603R 3369.99,-958.05 r180 bottom
R70 "10K" 0603R 3479.99,-1319.88 r90 top
R71 "100k" 0603R 3369.99,-1019.72 r180 bottom value=150K
R72 "10K" 0603R 3369.99,-1081.38 r0 bottom
R73 "0.02" "1206 10A" 3645.35,-701.38 r0 top value=0R02
R74 "47K" 0603R 937.49,-696.38 r270 top
R75 "100K" 0603R 968.49,-1046.38 r0 bottom
R76 "10K" 0603R 874.99,-696.38 r270 top
R77 "150K" 0603R 968.49,-986.38 r0 bottom
R78 "10K" 0603R 968.49,-926.38 r180 bottom
R79 "0.02" "1206 10A" 629.99,-1296.38 r180 top value=0R02
R80 "47K" 0603R 3169.99,-269.88 r180 top
R81 "100K" 0603R 2796.66,-286.38 r270 bottom
R82 "10K" 0603R 3169.99,-209.88 r180 top
R83 "100k" 0603R 2854.99,-286.38 r270 bottom value=150K
R84 "10K" 0603R 2913.33,-286.38 r90 bottom
R85 "0.02" "1206 10A" 2519.99,28.97 r90 top value=0R02
R86 "5.1k" 0805 2489.99,1168.62 r180 top
R87 "5.1k" 0805 2664.99,1168.62 r180 top
R88 "5.1k" 0805 2854.99,1168.62 r180 top
R89 "10k" 0603 2414.99,62.12 r90 top
R90 "3.3k" 0805R 1674.99,-544.38 r90 top
R91 "10K" 0805R 909.99,-1904.38 r90 bottom
R92 "10K" 0805R 994.99,-1811.38 r270 bottom
R93 "10K" 0805R -20,-2085 r270 bottom
R94 "10K" 0805R -20,-2383 r90 bottom
R98 "10K" 0805R 1246.99,168.62 r0 bottom value=10k
R101 "10K" 0805R 2354.99,-1364.38 r90 bottom
R102 "3.3k" 0805R 1457.99,-1356.38 r180 top
R103 "10K" 0805R 3454.99,-3072.08 r270 bottom value=10k
R104 "10K" 0805R 3354.99,-3070.08 r270 bottom value=10k
R105 "10K" 0805R 3109.99,-3072.08 r270 bottom value=10k
R106 "10K" 0805R 3009.99,-3072.08 r270 bottom value=10k
R107 "10K" 0805R 3009.99,-2842.08 r270 top
R108 "10K" 0805R 3109.99,-2842.08 r270 top
R109 "10K" 0805R 3354.99,-2842.08 r270 top
R110 "10K" 0805R 3454.99,-2842.08 r270 top
R111 "10K" 0603R -425.01,-696.38 r90 bottom
R112 "10K" 0603R -575.01,-696.38 r90 bottom
R113 "10K" 0603R -365.01,443.62 r180 bottom
R114 "10K" 0603R -410.01,303.62 r180 bottom
R115 "10K" 0603R 4739.99,443.62 r0 bottom
R116 "10K" 0603R 4744.99,593.62 r0 bottom
R117 "10K" 0603R 4859.99,-731.38 r180 bottom
R118 "10K" 0603R 4859.99,-796.38 r180 bottom
R119 "10K" 0805R 1289.99,-2221.38 r270 bottom value=10k
R120 "10K" 0805R 2846.99,-1876.38 r0 bottom value=10k
R121 "10K" 0805R 2849.99,-1976.38 r0 bottom value=10k
R122 "10K" 0805R 2846.99,-1781.38 r0 bottom value=10k
R123 "10K" 0805R 2851.99,-2081.38 r0 bottom value=10k
R124 "3.3k" 0805R 1029.99,-3295.08 r180 bottom
SMA_ANT "SMA_ANT" SMA_ANT 649.99,-3071.38 r90 top
U1 "MCU_LQFP144" LQFP144_0R5_SKT 2184.99,-1026.38 r90 top locked
U1_1 "A3930" LQFP-48 774.99,-208.27 r90 top
U2 "PCA9539_PW_24" PW24-L_pca9539 3159.99,-1956.38 r0 top value=Value
U3 "TL4050A10_DBZ_3" DBZ3-L 3824.99,-1746.38 r270 top value=Value
U4 "MC34152D" SO-G8 1349.99,658.62 r0 top
U6 "NRF2401P+" NRF2401P+_zeyao 4134.99,-2801.38 r180 top locked
U11 "ADUM141D0BRQZ" RQ_16 1309.99,-626.38 r0 top value=Value
U12 "CH340B" SOP16 1289.99,48.62 r180 top
U13 "SN65LBC175A-EP_16" SOP16 144.99,-297.38 r270 top locked value=Value
U14 "ADUM141D0BRQZ" RQ_16 3429.99,-391.38 r180 top value=Value
U15 "A3930" LQFP-48 3715.46,-166.85 r90 top
U16 "ADUM141D0BRQZ" RQ_16 3059.99,-1126.38 r270 top value=Value
U17 "A3930" LQFP-48 3464.99,-991.38 r0 top
U18 "SN65LBC175A-EP_16" SOP16 4314.99,-506.38 r90 top value=Value
U19 "ADUM141D0BRQZ" RQ_16 1329.99,-1011.38 r0 top value=Value
U20 "A3930" LQFP-48 875.62,-1016.38 r180 top
U21 "ADUM141D0BRQZ" RQ_16 2459.99,-376.38 r180 top locked value=Value
U22 "A3930" LQFP-48 2824.99,-196.77 r90 top
U23 "miniusb" "miniusb 180" 77,-2978.98 r0 top
U25 "LPMS-NAV2" LPMS-NAV2 1799.99,-2201.38 r0 top locked
U26 "ADS112C04IPWR" TSSOP_PW0016A_ADS112C04 3284.99,-1566.38 r0 top value=Value
X1 "32.768KHZ" FC-255 2798.07,-1214.46 r270 top
X2 "8MHZ" 5032 2809.99,-801.38 r90 top

## Footprints (in the part's own frame and the unit in brackets; to place one, negate y for a bottom-side part, rotate by r counter-clockwise, add the part's x,y. Pads: shape width x height; smd on the part's side, far side on the other; paste and mask are expansions set on the pad)
1*2_2.5mm [mm]
  rect 1.5x1.5 hole 0.9: 1(0,0)
  round 1.5 hole 0.9: 2(0,2.54)
  silkscreen extent -2.54,-2.54 2.54,5.08
1*6_2.5mm [mm] "1*6_2.5mm"
  rect 1.5x1.5 hole 0.9: 1(0,0)
  round 1.5 hole 0.9: 2(2.54,0) 3(5.08,0) 4(7.62,0) 5(10.16,0) 6(12.7,0)
  silkscreen extent -2.54,-2.54 15.24,2.54
2*3_2.5mm [mm]
  rect 1.5x1.5 hole 0.9: 1(0,0)
  round 1.5 hole 0.9: 2(0,2.54) 3(2.54,0) 4(2.54,2.54) 5(5.08,0) 6(5.08,2.54)
  silkscreen extent -2.54,-2.54 7.62,5.08
2*6_2.5mm [mm] "16V 12V 5V 3.3V"
  rect 1.5x1.5 hole 0.9: 1(0,0)
  round 1.5 hole 0.9: 2(0,2.54) 3(2.54,0) 4(2.54,2.54) 5(5.08,0) 6(5.08,2.54) 7(7.62,0) 8(7.62,2.54) 9(10.16,0) 10(10.16,2.54) 11(12.7,0) 12(12.7,2.54)
  silkscreen extent -2.54,-2.54 15.24,5.08
"8P - WF25122" [mil] "Used for Motor connecter in ZJUNlict"
  rect 60x60 hole 39.37: 1(0,-350)
  round 60 hole 39.37: 2(0,-250) 3(0,-150) 4(0,-50) 5(0,50) 6(0,150) 7(0,250) 8(0,350)
  silkscreen extent -79,-472 118,472
10 [mm]
  rect 1.5x1.5 hole 0.9: 1(0,-2.54)
  round 1.5 hole 0.9: 2(0,0) 3(2.54,-2.54) 4(2.54,0) 5(5.08,-2.54) 6(5.08,0) 7(7.62,-2.54) 8(7.62,0) 9(10.16,-2.54) 10(10.16,0)
  silkscreen extent -1.27,-3.81 11.68,1.27
470uF [mm] "Capacitor (Radial); 2 Leads"
  round 1.5 hole 0.9: 1(-2.5,0) 2(2.5,0)
  silkscreen extent -5.25,-5.25 5.25,5.25
0603 [mil]
  rect 38x31 smd: 1(-31.5,0) 2(31.5,0)
  silkscreen extent -60,-25 60,25
0603_diode [mil]
  rect 38x31 smd: 1(-31.5,0) 2(31.5,0)
  silkscreen extent -60,-25 60,25
0603C [mil]
  rect 38x31 smd: 1(-31.5,0) 2(31.5,0)
  silkscreen extent -60,-25 60,25
0603R [mil]
  rect 38x31 smd: 1(-31.5,0) 2(31.5,0)
  silkscreen extent -60,-25 60,25
0805 [mm]
  rect 1.3x1.5 smd: 1(-0.95,0) 2(0.95,0)
  silkscreen extent -2.03,-1.02 2.03,1.02
0805C [mm]
  rect 1.4x1.3 smd: 1(-0.102,0) 2(2.388,0)
  silkscreen extent -1.22,-0.88 3.49,0.87
0805D [mil] "二?"
  rect 50x50 smd: 1(0,0) 2(80,0)
  silkscreen extent -50,-50 130,50
0805R [mm]
  rect 1.4x1.3 smd: 1(0,0) 2(2.362,0)
  silkscreen extent -0.97,-0.91 3.33,0.91
"1206 10A" [mm]
  rect 1.52x1.6 smd: 1(0,0) 2(3.42,0)
  silkscreen extent -1.14,-1.14 4.57,1.14
5032 [mm] "8M晶振"
  rect 1.6x1.25 smd: 1(-1.85,-1.1) 2(1.85,-1.1) 3(1.85,1.1) 4(-1.85,1.1)
  silkscreen extent -1.9,-2.1 0.5,1.6
A6RV-161RS [mm] "旋转开?"
  rect 1.5x1.5 hole 0.9: 1(0,0)
  round 1.5 hole 0.9: 2(-5.08,-2.54) 3(-2.54,-2.54) 4(0,-2.54) 5(2.54,-2.54)
  silkscreen extent -6.27,-6.1 3.73,1.02
Buzzer [mil]
  round 60 hole 30: 1(-196.85,0) 2(196.85,0)
  silkscreen extent -271,-271 271,270
CAPPM7360X200N [mm] "470uF贴片"
  rect 2.65x4.5 smd: 1(-2.95,0) 2(2.95,0)
  silkscreen extent -4.28,-3 3.65,3, body extent -3.65,-3 3.65,3, height 2
DBZ3-L [mil]
  rect 20x40 smd: 1(-37.4,-38) 2(37.4,-38)
  rect 20x50.5 smd: 3(0,32.75)
  silkscreen extent -60,-28 60,28, body extent 0,0 10,10, height 10
FC-255 [mm] "32.768KHz晶振、"
  rect 1.3x2.2 smd: 1(-2.1,0) 2(2.1,0)
  silkscreen extent -2.93,-0.9 1,0.9
FUSE_HEADER [mm]
  rect 4.24x3.81 smd: 1(0,0) 2(6.38,0)
  silkscreen extent -2.54,-2.41 9.02,2.41
LPMS-NAV2 [mm] "LPMS-NAV2"
  rect 1.9x1.4 smd: 1(-10.16,5.08) 2(-10.16,2.54) 3(-10.16,0) 4(-10.16,-2.54) 5(-10.16,-5.08) 11(10.16,-5.08) 12(10.16,-2.54) 13(10.16,0) 14(10.16,2.54) 15(10.16,5.08)
  rect 1.4x1.9 smd: 6(-5.08,-10.16) 7(-2.54,-10.16) 8(0,-10.16) 9(2.54,-10.16) 10(5.08,-10.16) 16(5.08,10.16) 17(2.54,10.16) 18(0,10.16) 19(-2.54,10.16) 20(-5.08,10.16)
  silkscreen extent -12.19,-8 8,8
LQFP144_0R5_SKT [mm] "32-bit MCU ARM-based Cortex-M3 20 X 20mm, 0.5mm Pitch, 1.6mm Max thickness"
  rect 0.3x1.65 smd: 1(-8.75,-10.625) 2(-8.25,-10.625) 3(-7.75,-10.625) 4(-7.25,-10.625) 5(-6.75,-10.625) 6(-6.25,-10.625) 7(-5.75,-10.625) 8(-5.25,-10.625) 9(-4.75,-10.625) 10(-4.25,-10.625) 11(-3.75,-10.625) 12(-3.25,-10.625) 13(-2.75,-10.625) 14(-2.25,-10.625) 15(-1.75,-10.625) 16(-1.25,-10.625) 17(-0.75,-10.625) 18(-0.25,-10.625) 19(0.25,-10.625) 20(0.75,-10.625) 21(1.25,-10.625) 22(1.75,-10.625) 23(2.25,-10.625) 24(2.75,-10.625) 25(3.25,-10.625) 26(3.75,-10.625) 27(4.25,-10.625) 28(4.75,-10.625) 29(5.25,-10.625) 30(5.75,-10.625) 31(6.25,-10.625) 32(6.75,-10.625) 33(7.25,-10.625) 34(7.75,-10.625) 35(8.25,-10.625) 36(8.75,-10.625) 73(8.75,10.625) 74(8.25,10.625) 75(7.75,10.625) 76(7.25,10.625) 77(6.75,10.625) 78(6.25,10.625) 79(5.75,10.625) 80(5.25,10.625) 81(4.75,10.625) 82(4.25,10.625) 83(3.75,10.625) 84(3.25,10.625) 85(2.75,10.625) 86(2.25,10.625) 87(1.75,10.625) 88(1.25,10.625) 89(0.75,10.625) 90(0.25,10.625) 91(-0.25,10.625) 92(-0.75,10.625) 93(-1.25,10.625) 94(-1.75,10.625) 95(-2.25,10.625) 96(-2.75,10.625) 97(-3.25,10.625) 98(-3.75,10.625) 99(-4.25,10.625) 100(-4.75,10.625) 101(-5.25,10.625) 102(-5.75,10.625) 103(-6.25,10.625) 104(-6.75,10.625) 105(-7.25,10.625) 106(-7.75,10.625) 107(-8.25,10.625) 108(-8.75,10.625)
  rect 1.65x0.3 smd: 37(10.625,-8.75) 38(10.625,-8.25) 39(10.625,-7.75) 40(10.625,-7.25) 41(10.625,-6.75) 42(10.625,-6.25) 43(10.625,-5.75) 44(10.625,-5.25) 45(10.625,-4.75) 46(10.625,-4.25) 47(10.625,-3.75) 48(10.625,-3.25) 49(10.625,-2.75) 50(10.625,-2.25) 51(10.625,-1.75) 52(10.625,-1.25) 53(10.625,-0.75) 54(10.625,-0.25) 55(10.625,0.25) 56(10.625,0.75) 57(10.625,1.25) 58(10.625,1.75) 59(10.625,2.25) 60(10.625,2.75) 61(10.625,3.25) 62(10.625,3.75) 63(10.625,4.25) 64(10.625,4.75) 65(10.625,5.25) 66(10.625,5.75) 67(10.625,6.25) 68(10.625,6.75) 69(10.625,7.25) 70(10.625,7.75) 71(10.625,8.25) 72(10.625,8.75) 109(-10.625,8.75) 110(-10.625,8.25) 111(-10.625,7.75) 112(-10.625,7.25) 113(-10.625,6.75) 114(-10.625,6.25) 115(-10.625,5.75) 116(-10.625,5.25) 117(-10.625,4.75) 118(-10.625,4.25) 119(-10.625,3.75) 120(-10.625,3.25) 121(-10.625,2.75) 122(-10.625,2.25) 123(-10.625,1.75) 124(-10.625,1.25) 125(-10.625,0.75) 126(-10.625,0.25) 127(-10.625,-0.25) 128(-10.625,-0.75) 129(-10.625,-1.25) 130(-10.625,-1.75) 131(-10.625,-2.25) 132(-10.625,-2.75) 133(-10.625,-3.25) 134(-10.625,-3.75) 135(-10.625,-4.25) 136(-10.625,-4.75) 137(-10.625,-5.25) 138(-10.625,-5.75) 139(-10.625,-6.25) 140(-10.625,-6.75) 141(-10.625,-7.25) 142(-10.625,-7.75) 143(-10.625,-8.25) 144(-10.625,-8.75)
  silkscreen extent -10,-12.27 10,10, body extent -10.93,-10.93 10.93,10.93, height 7
LQFP-48 [mm] "TSQFP, 48-Leads, Body 9,0x9,0mm (max), Pitch 0,50mm, IPC Medium Density"
  oval 1.9x0.3 smd: 1(-4.2,2.75) 2(-4.2,2.25) 3(-4.2,1.75) 4(-4.2,1.25) 5(-4.2,0.75) 6(-4.2,0.25) 7(-4.2,-0.25) 8(-4.2,-0.75) 9(-4.2,-1.25) 10(-4.2,-1.75) 11(-4.2,-2.25) 12(-4.2,-2.75) 25(4.2,-2.75) 26(4.2,-2.25) 27(4.2,-1.75) 28(4.2,-1.25) 29(4.2,-0.75) 30(4.2,-0.25) 31(4.2,0.25) 32(4.2,0.75) 33(4.2,1.25) 34(4.2,1.75) 35(4.2,2.25) 36(4.2,2.75)
  oval 0.3x1.9 smd: 13(-2.75,-4.2) 14(-2.25,-4.2) 15(-1.75,-4.2) 16(-1.25,-4.2) 17(-0.75,-4.2) 18(-0.25,-4.2) 19(0.25,-4.2) 20(0.75,-4.2) 21(1.25,-4.2) 22(1.75,-4.2) 23(2.25,-4.2) 24(2.75,-4.2) 37(2.75,4.2) 38(2.25,4.2) 39(1.75,4.2) 40(1.25,4.2) 41(0.75,4.2) 42(0.25,4.2) 43(-0.25,4.2) 44(-0.75,4.2) 45(-1.25,4.2) 46(-1.75,4.2) 47(-2.25,4.2) 48(-2.75,4.2)
  silkscreen extent -4.32,-2.85 2.85,3.57, body extent -4.5,-4.5 4.5,4.5, height 1.5
"miniusb 180" [mm]
  rect 0.7x1.8 hole 1.6 slot 0.5 at 0 deg: 0(-3.65,0) 0(3.65,0)
  round 0.75 hole 0.55: 1(-1.6,-0.95) 2(-0.8,0.95) 3(0,-0.95) 4(0.8,0.95) 5(1.6,-0.95)
  silkscreen extent -4.19,-2.03 4.32,2.16
NICERF2401F27 [mm] "NICERF2401F27"
  rrect50% 3x0.8 smd: 1(0,0) 2(0,-1.27) 3(0,-2.54) 4(0,-3.81) 5(0,-5.08) 6(0,-6.35) 7(0,-7.62) 8(0,-8.89) 9(0,-10.16) 10(0,-11.43) 11(0,-12.7) 12(31.44,-2.63) 13(31.44,-4.63) 14(31.44,-10.88)
  silkscreen extent -1.3,-14.22 31.44,1.72
NRF2401P+_zeyao [mm]
  rect 2x3 smd: 0(-0.532,-18.923) 0(9.271,-18.923)
  rect 0.508x2 smd: 1(8.89,0) 2(7.62,0) 3(6.35,0) 4(5.08,0) 5(3.81,0) 6(2.54,0) 7(1.27,0) 8(0,0)
  silkscreen extent -2,-19 12.19,1.52
PW24-L_pca9539 [mil]
  rect 54x12 smd paste+0 mask+0: 1(-109,140.75) 2(-109,115.16) 3(-109,89.57) 4(-109,63.98) 5(-109,38.39) 6(-109,12.8) 7(-109,-12.8) 8(-109,-38.39) 9(-109,-63.98) 10(-109,-89.57) 11(-109,-115.16) 12(-109,-140.75) 13(109,-140.75) 14(109,-115.16) 15(109,-89.57) 16(109,-63.98) 17(109,-38.39) 18(109,-12.8) 19(109,12.8) 20(109,38.39) 21(109,63.98) 22(109,89.57) 23(109,115.16) 24(109,140.75)
  silkscreen extent -156,-160 156,160, body extent 0,0 10,10, height 10
RQ_16 [mil] "ADuM141D"
  rect 51x12 smd paste+0 mask+0: 1(-102.5,87.5) 2(-102.5,62.5) 3(-102.5,37.5) 4(-102.5,12.5) 5(-102.5,-12.5) 6(-102.5,-37.5) 7(-102.5,-62.5) 8(-102.5,-87.5) 9(102.5,-87.5) 10(102.5,-62.5) 11(102.5,-37.5) 12(102.5,-12.5) 13(102.5,12.5) 14(102.5,37.5) 15(102.5,62.5) 16(102.5,87.5)
  silkscreen extent -68,-103 148,103, body extent 0,0 10,10, height 10
SHDR2 [mm]
  rect 0.95x0.95 hole 0.55: 1(0,0)
  round 0.95 hole 0.55: 2(-1.25,0)
  silkscreen extent -2.75,-1.11 1.7,2.29
SHDR3 [mm]
  rect 0.95x0.95 hole 0.55: 1(0,0)
  round 0.95 hole 0.55: 2(-1.25,0) 3(-2.5,0)
  silkscreen extent -4,-1.11 1.7,2.29
SHDR5 [mm]
  rect 1.1x1.1 hole 0.7: 1(0,0)
  round 1.1 hole 0.7: 2(1.25,0) 3(2.5,0) 4(3.75,0) 5(5,0)
  silkscreen extent -1.5,-2.07 6.5,1.12
SHDR6 [mm]
  rect 0.95x0.95 hole 0.55: 1(0,0)
  round 0.95 hole 0.55: 2(1.25,0) 3(2.5,0) 4(3.75,0) 5(5,0) 6(6.25,0)
  silkscreen extent -1.7,-2.25 7.75,1.15
SHDR8 [mil] "Used for Motor connecter in ZJUNlict"
  rect 60x60 hole 39.37: 1(0,-350)
  round 60 hole 39.37: 2(0,-250) 3(0,-150) 4(0,-50) 5(0,50) 6(0,150) 7(0,250) 8(0,350)
  silkscreen extent -157,-492 157,492
SMA_ANT [mm]
  round 2 hole 1.5: 1(0,0) 2(-2.54,-2.54) 2(-2.54,2.54) 2(2.54,-2.54) 2(2.54,2.54)
"so-8 bg" [mm]
  rect 2.2x0.6 smd: 1(0,0) 2(0,-1.27) 3(0,-2.54) 4(0,-3.81) 5(5.2,-3.81) 6(5.2,-2.54) 7(5.2,-1.27) 8(5.2,0)
  silkscreen extent -0.12,-4.4 3.7,0.98
SO-G3/Y1 [mm]
  rect 0.85x1 smd: 1(-1.331,-0.692) 2(0.569,-0.692) 3(-0.381,1.708)
  silkscreen extent -2.43,-0.82 0.89,1.71
SO-G8 [mm]
  rect 0.6x2.2 smd: 1(-1.905,-2.6) 2(-0.635,-2.6) 3(0.635,-2.6) 4(1.905,-2.6) 5(1.905,2.6) 6(0.635,2.6) 7(-0.635,2.6) 8(-1.905,2.6)
  silkscreen extent -2.88,-2.72 2.5,1.1
SOP16 [mil] "CH340B/SN65"
  rect 73x20 smd paste+0 mask+0: 1(-131,175) 2(-131,125) 3(-131,75) 4(-131,25) 5(-131,-25) 6(-131,-75) 7(-131,-125) 8(-131,-175) 9(131,-175) 10(131,-125) 11(131,-75) 12(131,-25) 13(131,25) 14(131,75) 15(131,125) 16(131,175)
  silkscreen extent -115,-212 188,212, body extent 0,0 10,10, height 10
TSSOP_PW0016A_ADS112C04 [mm]
  oval 2.2x0.4 smd paste+0 mask+0: 1(-3.35,2.275) 2(-3.35,1.625) 3(-3.35,0.975) 4(-3.35,0.325) 5(-3.35,-0.325) 6(-3.35,-0.975) 7(-3.35,-1.625) 8(-3.35,-2.275) 9(3.35,-2.275) 10(3.35,-1.625) 11(3.35,-0.975) 12(3.35,-0.325) 13(3.35,0.325) 14(3.35,0.975) 15(3.35,1.625) 16(3.35,2.275)
  silkscreen extent -3.05,-2.55 2,3.17, body extent 0,0 0.25,0.25, height 0.25
安装孔-3.5-5 [mm]
  round 5 hole 3.5: 1(0,0)
  silkscreen extent -2.7,-2.7 2.7,2.7

## Part data
C1 C2 C3 C8 C9 C10 C11 C12 C13 C16 C41 C42 C43 C44 C45 C54 C55 C66 C67 C78 C79 C85 C91 C95 C96 C97 C98 C99: library part Cap, "Capacitor", LatestRevisionDate=17-Jul-2002, LatestRevisionNote="Re-released for DXP Platform.", Published=8-Jun-2000, Publisher="Altium Limited"
C1_1 C2_1 C3_1 C5_1 C6_1 C7_1 C8_1 C9_1 C11_1 C12_1 C14 C15 C17 C18 C46 C47 C48 C49 C50 C51 C52 C53 C56 C57 C58 C59 C60 C61 C62 C63 C64 C65 C68 C69 C70 C71 C72 C73 C74 C75 C76 C77 C80 C81 C82 C83 C84 C86 C87 C88 C89 C90 C93: library part Cap, "Capacitor", Manufacturer="Generic Components", Class=Passive, Published=08/06/2000, Publisher="Altium Hobart Technology Centre", SubClass=Capacitor
C38 C92 C107 C108 C109 C112: library part "Cap Pol1", "Polarized Capacitor (Radial)", LatestRevisionDate=17-Jul-2002, LatestRevisionNote="Re-released for DXP Platform.", PackageDescription="Polarized Capacitor (Radial); 2 Leads", PackageReference=RB7.6-15, Published=8-Jun-2000, Publisher="Altium Limited"
C103 C110: library part T523H477M016APE0707280, "470uF电容贴片", Manufacturer_Name=Kemet, Mouser Part Number=80-T523H477M16P070LR, Datasheet Link=https://api.kemet.com/component-edge/download/datasheet/T523H477M016APE0707280.pdf, Height=2mm, Manufacturer_Part_Number=T523H477M016APE0707280, Mouser Price/Stock=https://www.mouser.com/Search/Refine.aspx?Keyword=80-T523H477M16P070LR
C104 C111: library part CAP, "Capacitor"
DS1 DS4: "Typical RED, GREEN, YELLOW, AMBER GaAs LED", Manufacturer="Generic Components", Class=Optoelectronic, Published=08/06/2000, Publisher="Altium Hobart Technology Centre", SubClass=LED
DS2 DS3 DS5: "Typical RED, GREEN, YELLOW, AMBER GaAs LED", LatestRevisionDate=17-Jul-2002, LatestRevisionNote="Re-released for DXP Platform.", Published=8-Jun-2000, Publisher="Altium Limited"
F1_1 F3 F4 F5 F6: library part FUSE
JP1: "Header, 3-Pin", LatestRevisionDate=17-Jul-2002, LatestRevisionNote="Re-released for DXP Platform.", Publisher="Altium Limited"
JP2: "Header, 2-Pin", LatestRevisionDate=17-Jul-2002, LatestRevisionNote="Re-released for DXP Platform.", Publisher="Altium Limited"
JP5: library part "Header 6X2", "Header, 4-Pin, Dual row", LatestRevisionDate=17-Jul-2002, LatestRevisionNote="Re-released for DXP Platform.", Publisher="Altium Limited"
LS1: Manufacturer="Generic Components", Published=1999
P1 P2 P3 P25: "RF Coaxial PCB Connector, MMCX; Thru-Hole, Vertical Mount Plug,  50 Ohm Impedance", PackageDocument="Rev. A, 16-Jun-1997", ComponentLink1Description="Manufacturer Link", ComponentLink1URL=http://www.amphenolrf.com/, DatasheetDocument=30-May-2003, DrillSize="Corresponds to nominal value.", LatestRevisionDate=15-Jul-2004, LatestRevisionNote="Component Replaced.", PackageReference=908-21103, PCB_Layout="Complies with manufacturer's recommendation.", Published=15-Jul-2004, Publisher="Altium Limited"
P1_1 P8 P10 P12 P14 P16 P17 P18 P19 P20: "Used for Motor connection in ZJUNlict"
P2_1 P11 P13 P15: "Header, 5-Pin", LatestRevisionDate=17-Jul-2002, LatestRevisionNote="Re-released for DXP Platform.", Publisher="Altium Limited"
P4 P5 P6 P7: library part Plug, "Plug", LatestRevisionDate=17-Jul-2002, LatestRevisionNote="Re-released for DXP Platform.", Publisher="Altium Limited"
P21 P22 P23 P24: library part "Header 6", "Header, 5-Pin", LatestRevisionDate=17-Jul-2002, LatestRevisionNote="Re-released for DXP Platform.", Publisher="Altium Limited"
Q1 Q2: library part BC817-40, "NPN General Purpose Amplifier", Manufacturer="Fairchild Semiconductor", Class=Discrete, Published=8/06/2000, Publisher="Altium Hobart Technology Centre", Revised="11-July-2000: SIM Model Added.", SubClass="BJT - Low Power"
Q1_1 Q2_1 Q3_1 Q6 Q7 Q8 Q9 Q10 Q11 Q12 Q13 Q14 Q15 Q16 Q17: library part "SO-8 IRF8313"
R1 R1_1 R2 R2_1 R3 R3_1 R4 R4_1 R5 R5_1 R6 R6_1 R7 R11 R12 R13 R14 R15 R16 R17 R18 R19 R20 R21 R22 R23 R24 R25 R26 R27 R28 R29 R30 R31 R32 R33 R34 R35 R36 R37 R38 R39 R40 R41 R42 R43 R44 R45 R48 R49 R50 R51 R62 R63 R64 R65 R66 R67 R68 R69 R70 R71 R72 R73 R74 R75 R76 R77 R78 R79 R80 R81 R82 R83 R84 R85 R90 R91 R92 R93 R94 R98 R101 R102 R103 R104 R105 R106 R107 R108 R109 R110 R111 R112 R113 R114 R115 R116 R117 R118 R119 R120 R121 R122 R123 R124: library part Res1, "Resistor", Manufacturer="Generic Components", Class=Passive, Published=08/06/2000, Publisher="Altium Hobart Technology Centre", SubClass=Resistor
R46 R47: library part SR0805, "Resistance"
R58 R59 R60 R61 R86 R87 R88 R89: library part res
U1_1 U15 U17 U20 U22: library part "LQFP 48"
U2: "Remote 16-Bit I2C And SMBus, Low-Power I/O Expander With Interrupt Output, Reset & Config. Registers", Manufacturer="Texas Instruments", Manufacturer_Part_Number=pca9539_pw_24, PACKAGE_DESIGNATOR=PW, Datasheet_URL=http://www.ti.com/lit/gpn/PCA9539, FAMILY_NAME="I2C IO EXPANDER", GENERIC_PART_NUMBER=PCA9539, INDUSTRY_STD_PKG_TYPE=TSSOP, PIN_COUNT=24, RefDes=RefDes, Type=DEV, Vendor="Texas Instruments"
U3: "Precision Micropower Shunt Voltage Reference", Manufacturer="Texas Instruments", Manufacturer_Part_Number=tl4050a10_dbz_3, PACKAGE_DESIGNATOR=DBZ, Datasheet_URL=http://www.ti.com/lit/gpn/TL4050A10, FAMILY_NAME="SHUNT VOLTAGE REFERENCE", GENERIC_PART_NUMBER=TL4050A10, INDUSTRY_STD_PKG_TYPE=SOT-23, PIN_COUNT=3, RefDes=RefDes, Type=DEV, Vendor="Texas Instruments"
U4: "High Speed Dual MOSFET Driver", Manufacturer=Motorola, Class=Interface, Published=15/04/2002, Publisher="Altium Hobart Technology Centre", SubClass="MOSFET Driver"
U11 U14 U16 U19 U21: "Imported", RefDes=RefDes, Type=DEV
U13 U18: "Quadruple 2-Input Positive-NAND Gates", Manufacturer="Texas Instruments", PACKAGE_DESIGNATOR=D, Datasheet_URL=http://www.ti.com/lit/gpn/74AC11000, FAMILY_NAME="NAND GATE", GENERIC_PART_NUMBER=74AC11000, INDUSTRY_STD_PKG_TYPE=SOIC, PIN_COUNT=16, RefDes=RefDes, Type=DEV
U26: "Imported", Manufacturer="Texas Instruments", PartNumber=ADS112C04IPWR, RefDes=RefDes, Type=DEV
X1: library part CRYSTAL, "Crystal"
X2: library part ECS-80-18-30B-AGN-TR, "Crystal or Oscillator", Manufacturer_Name=ECS, Mouser Part Number=520-80-18-30B-AGNT, Datasheet Link=http://www.ecsxtal.com/store/pdf/ecx_53b.pdf, Height=0.85mm, Manufacturer_Part_Number=ECS-80-18-30B-AGN-TR, Mouser Price/Stock=https://www.mouser.com/Search/Refine.aspx?Keyword=520-80-18-30B-AGNT

## Via types
v1: diameter 20, hole 10, Top Layer to Bottom Layer, 507 vias
v2: diameter 25, hole 12, Top Layer to Bottom Layer, 48 vias
v3: diameter 60, hole 40, Top Layer to Bottom Layer, 40 vias
v4: diameter 30, hole 16, Top Layer to Bottom Layer, 3 vias
v5: diameter 32, hole 16, Top Layer to Bottom Layer, 1 vias

## Nets (pads, with @x,y where several pads share a name; then routed paths per layer and width w, separated by ;. In a path a pad name is that pad's centre, name@x,y a point inside that pad or via, vN(x,y) a via of type N, cw(c..) or ccw(c..) an arc to the next point about the centre after c; other vN are vias at no path point)
1280_RXEN: NICERF2401F27.10 U1.128 | length 3481.5
  Top Layer w10: v1(304.99,-1701.38) NICERF2401F27.10@304.99,-1596.38 ; U1.128@2214.52,-1444.69 2214.52,-1505.91 2264.99,-1556.38 v1(2264.99,-1551.38)
  Bottom Layer w10: v1(304.99,-1701.38) 304.99,-2331.38 464.99,-2491.38 1054.99,-2491.38 1114.99,-2431.38 1114.99,-2287.62 1293.99,-2108.62 1293.99,-1922.38 1534.99,-1681.38 2134.99,-1681.38 v1(2264.99,-1551.38)
1280_TXEN: NICERF2401F27.9 U1.129 | length 3347.2
  Top Layer w10: v1(354.99,-1696.38) NICERF2401F27.9@354.99,-1596.38 ; U1.129@2234.2,-1444.69 2234.2,-1490.59 2249.99,-1506.38 v1(2254.99,-1506.38) v1@2259.99,-1506.38
  Bottom Layer w10: v1(354.99,-1696.38) 354.99,-2326.38 489.99,-2461.38 1044.99,-2461.38 1097.99,-2408.38 1097.99,-2280.58 1276.99,-2101.58 1276.99,-1909.38 1529.99,-1656.38 2104.99,-1656.38 v1(2254.99,-1506.38)
+2.5V: C14.2 C15.2 R43.1 U3.1 U26.9 | length 642
  Top Layer w10: U26.9@3416.88,-1655.95 3469.56,-1655.95 3499.99,-1686.38 3773.64,-1686.38 3786.99,-1673.03 ; U3.1@3786.99,-1708.98 3786.99,-1673.03 ; C15.2@3854.05,-1645.83 C15.2@3865.49,-1634.38 ; C14.2@3944.99,-1637.07 3942.31,-1634.38 C15.2@3865.49,-1634.38 ; 3786.99,-1673.03 3786.99,-1637.08 R43.1@3784.3,-1634.38 C15.2@3865.49,-1634.38